# Altium PCB PCB.PcbDoc (part 1 of 2)
Units mil, origin at the board's own origin, x right, y up, seen from the top; angles counter-clockwise.
Board outline 3936.02 x 2558.06 mil, 4 copper layers (Top Layer 1, Top Layer, Bottom Layer, Bottom Layer 1), stack 58.4 mil thick; 158 components, 106 nets, 653 pads, 482 vias.
Unrouted connection lines stored in the file: 11.
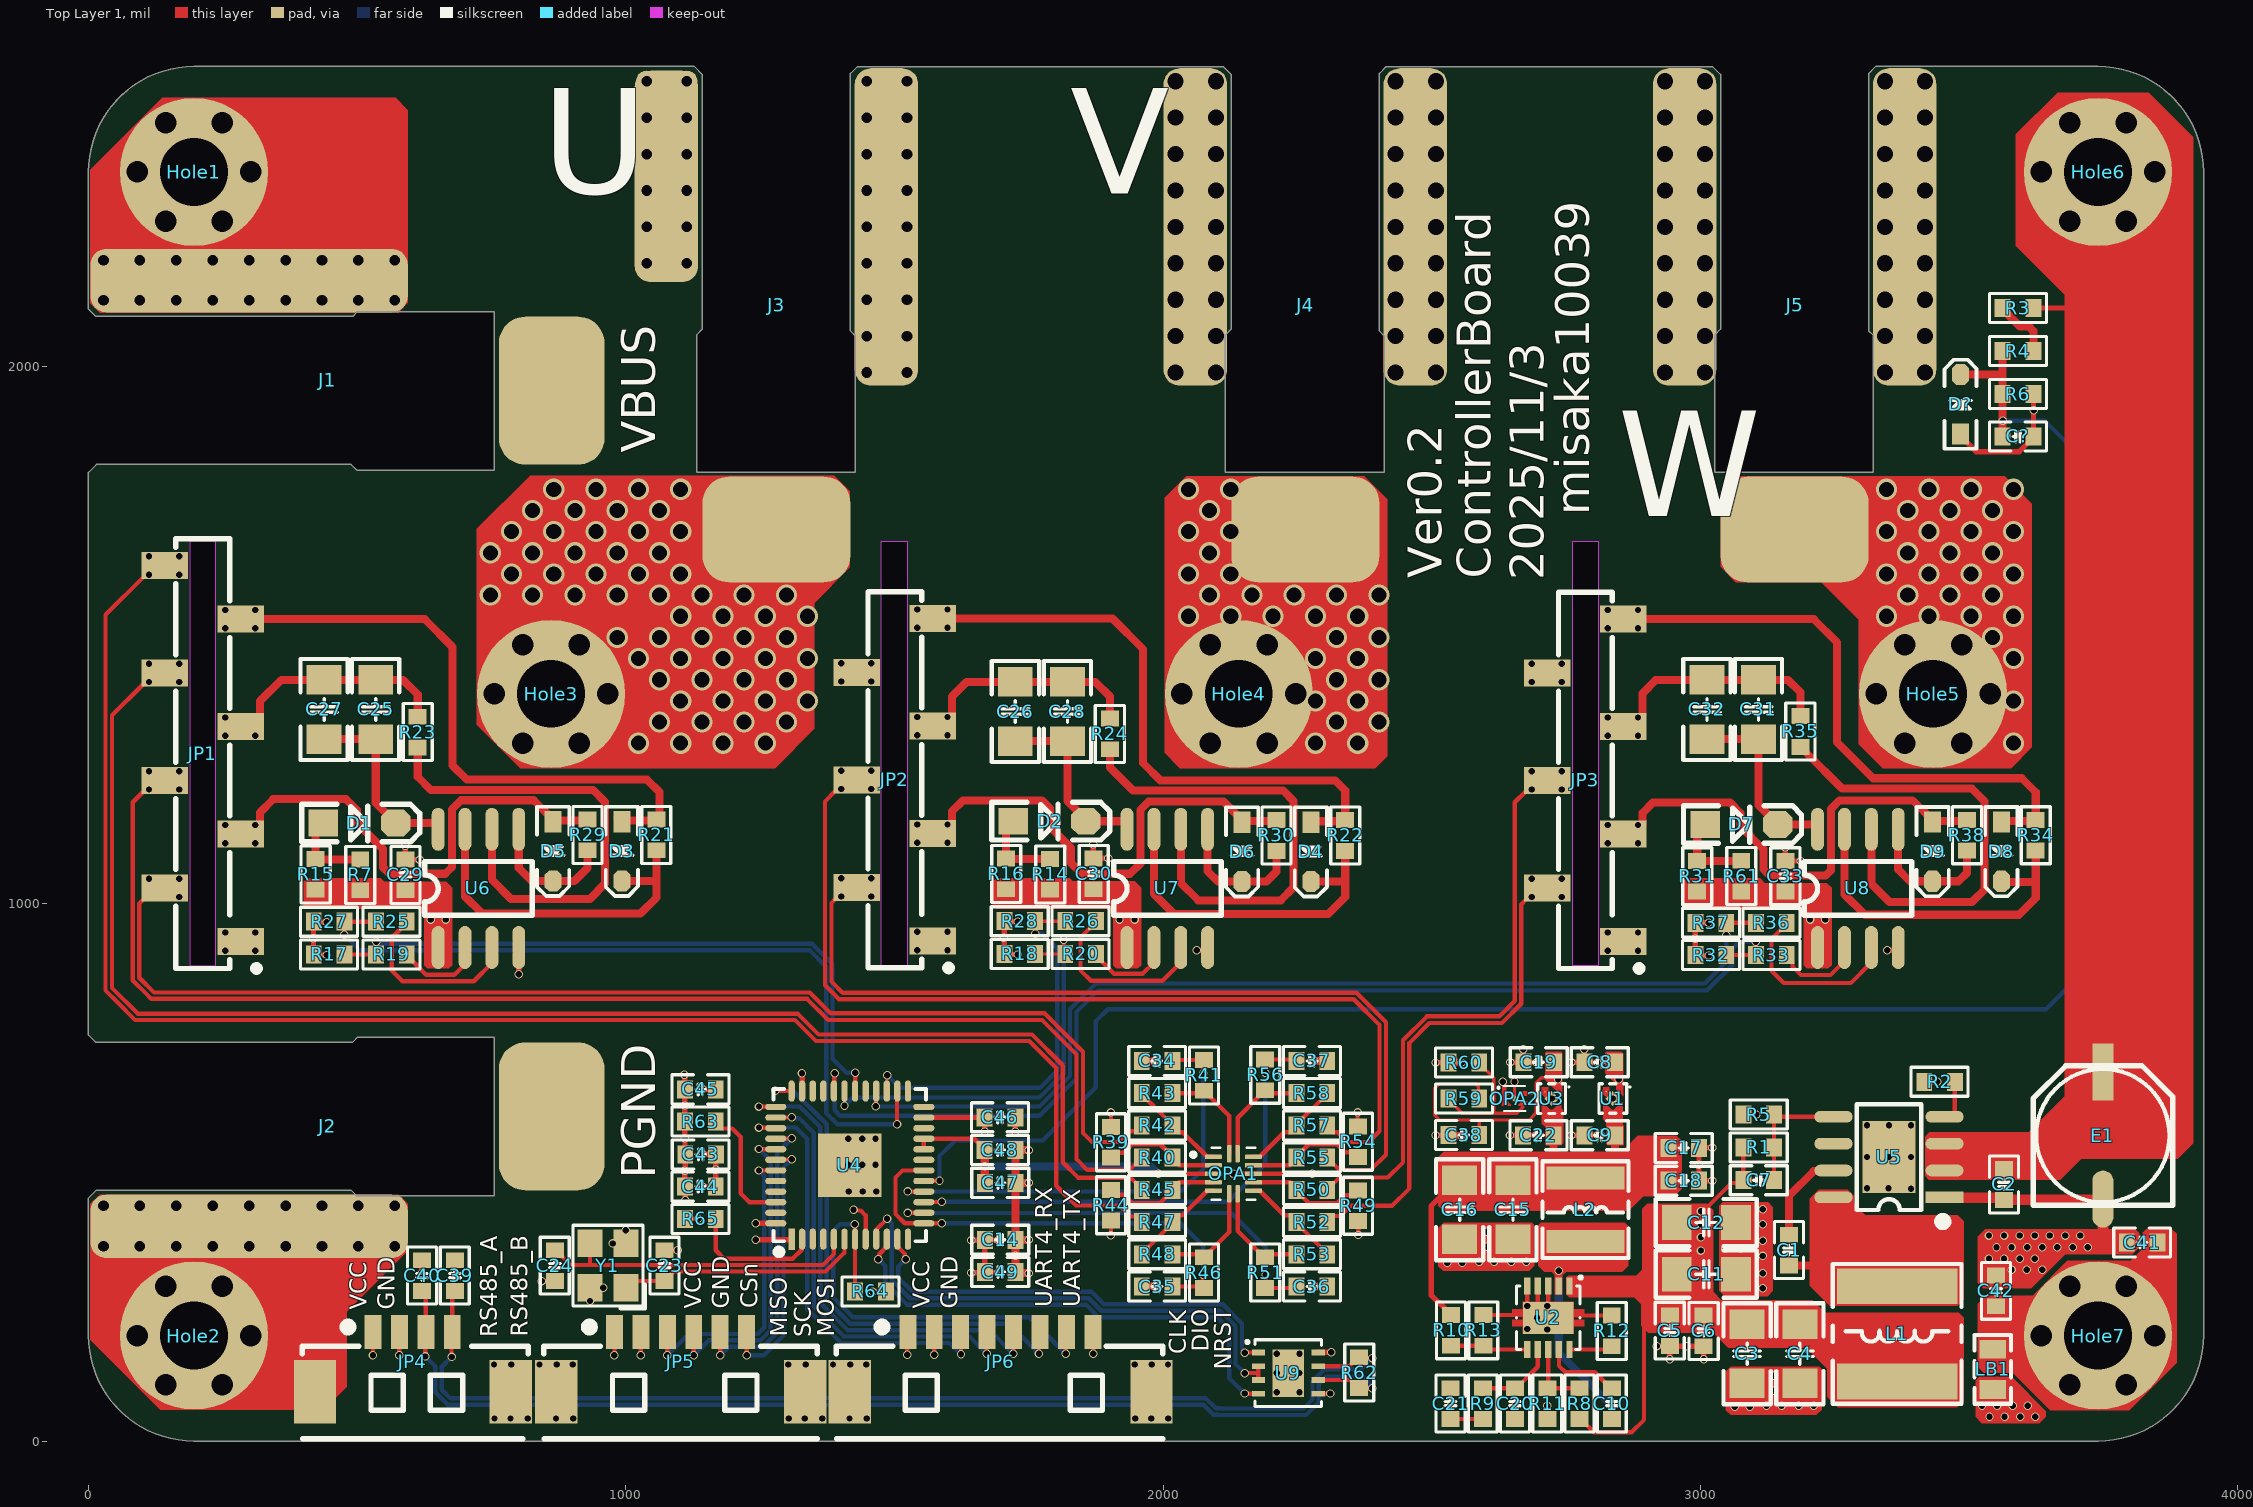
[diagram p0: Top Layer 1 view]
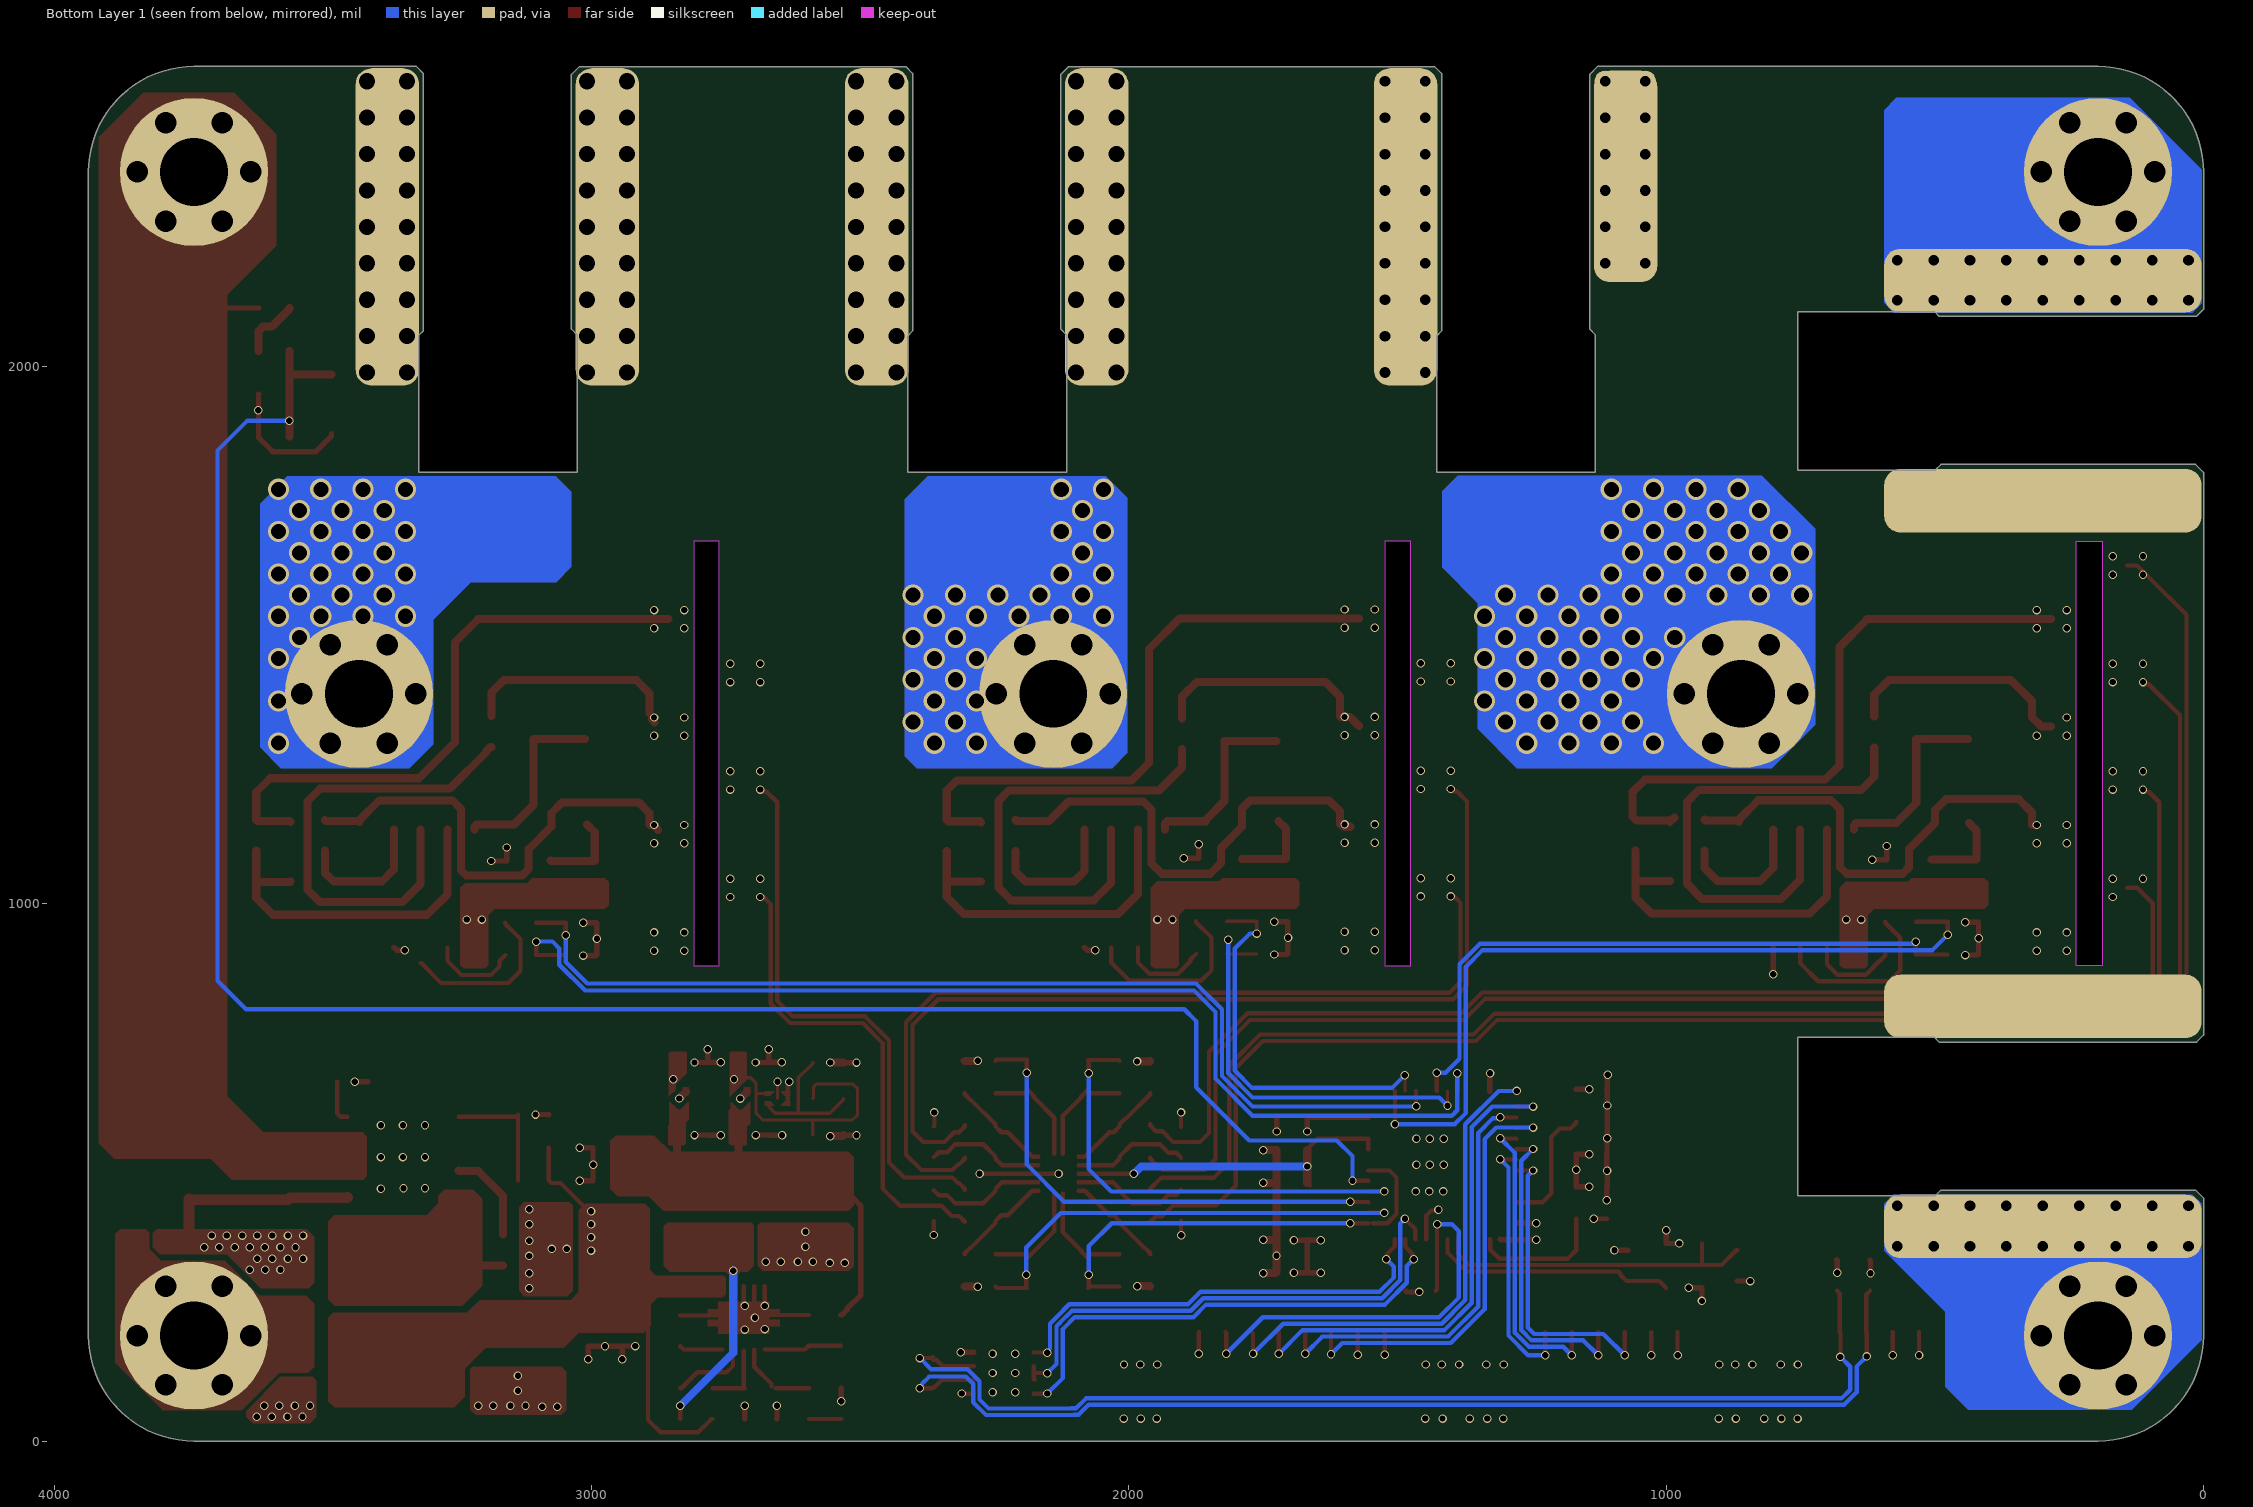
[diagram p1: Bottom Layer 1 view, seen from below]
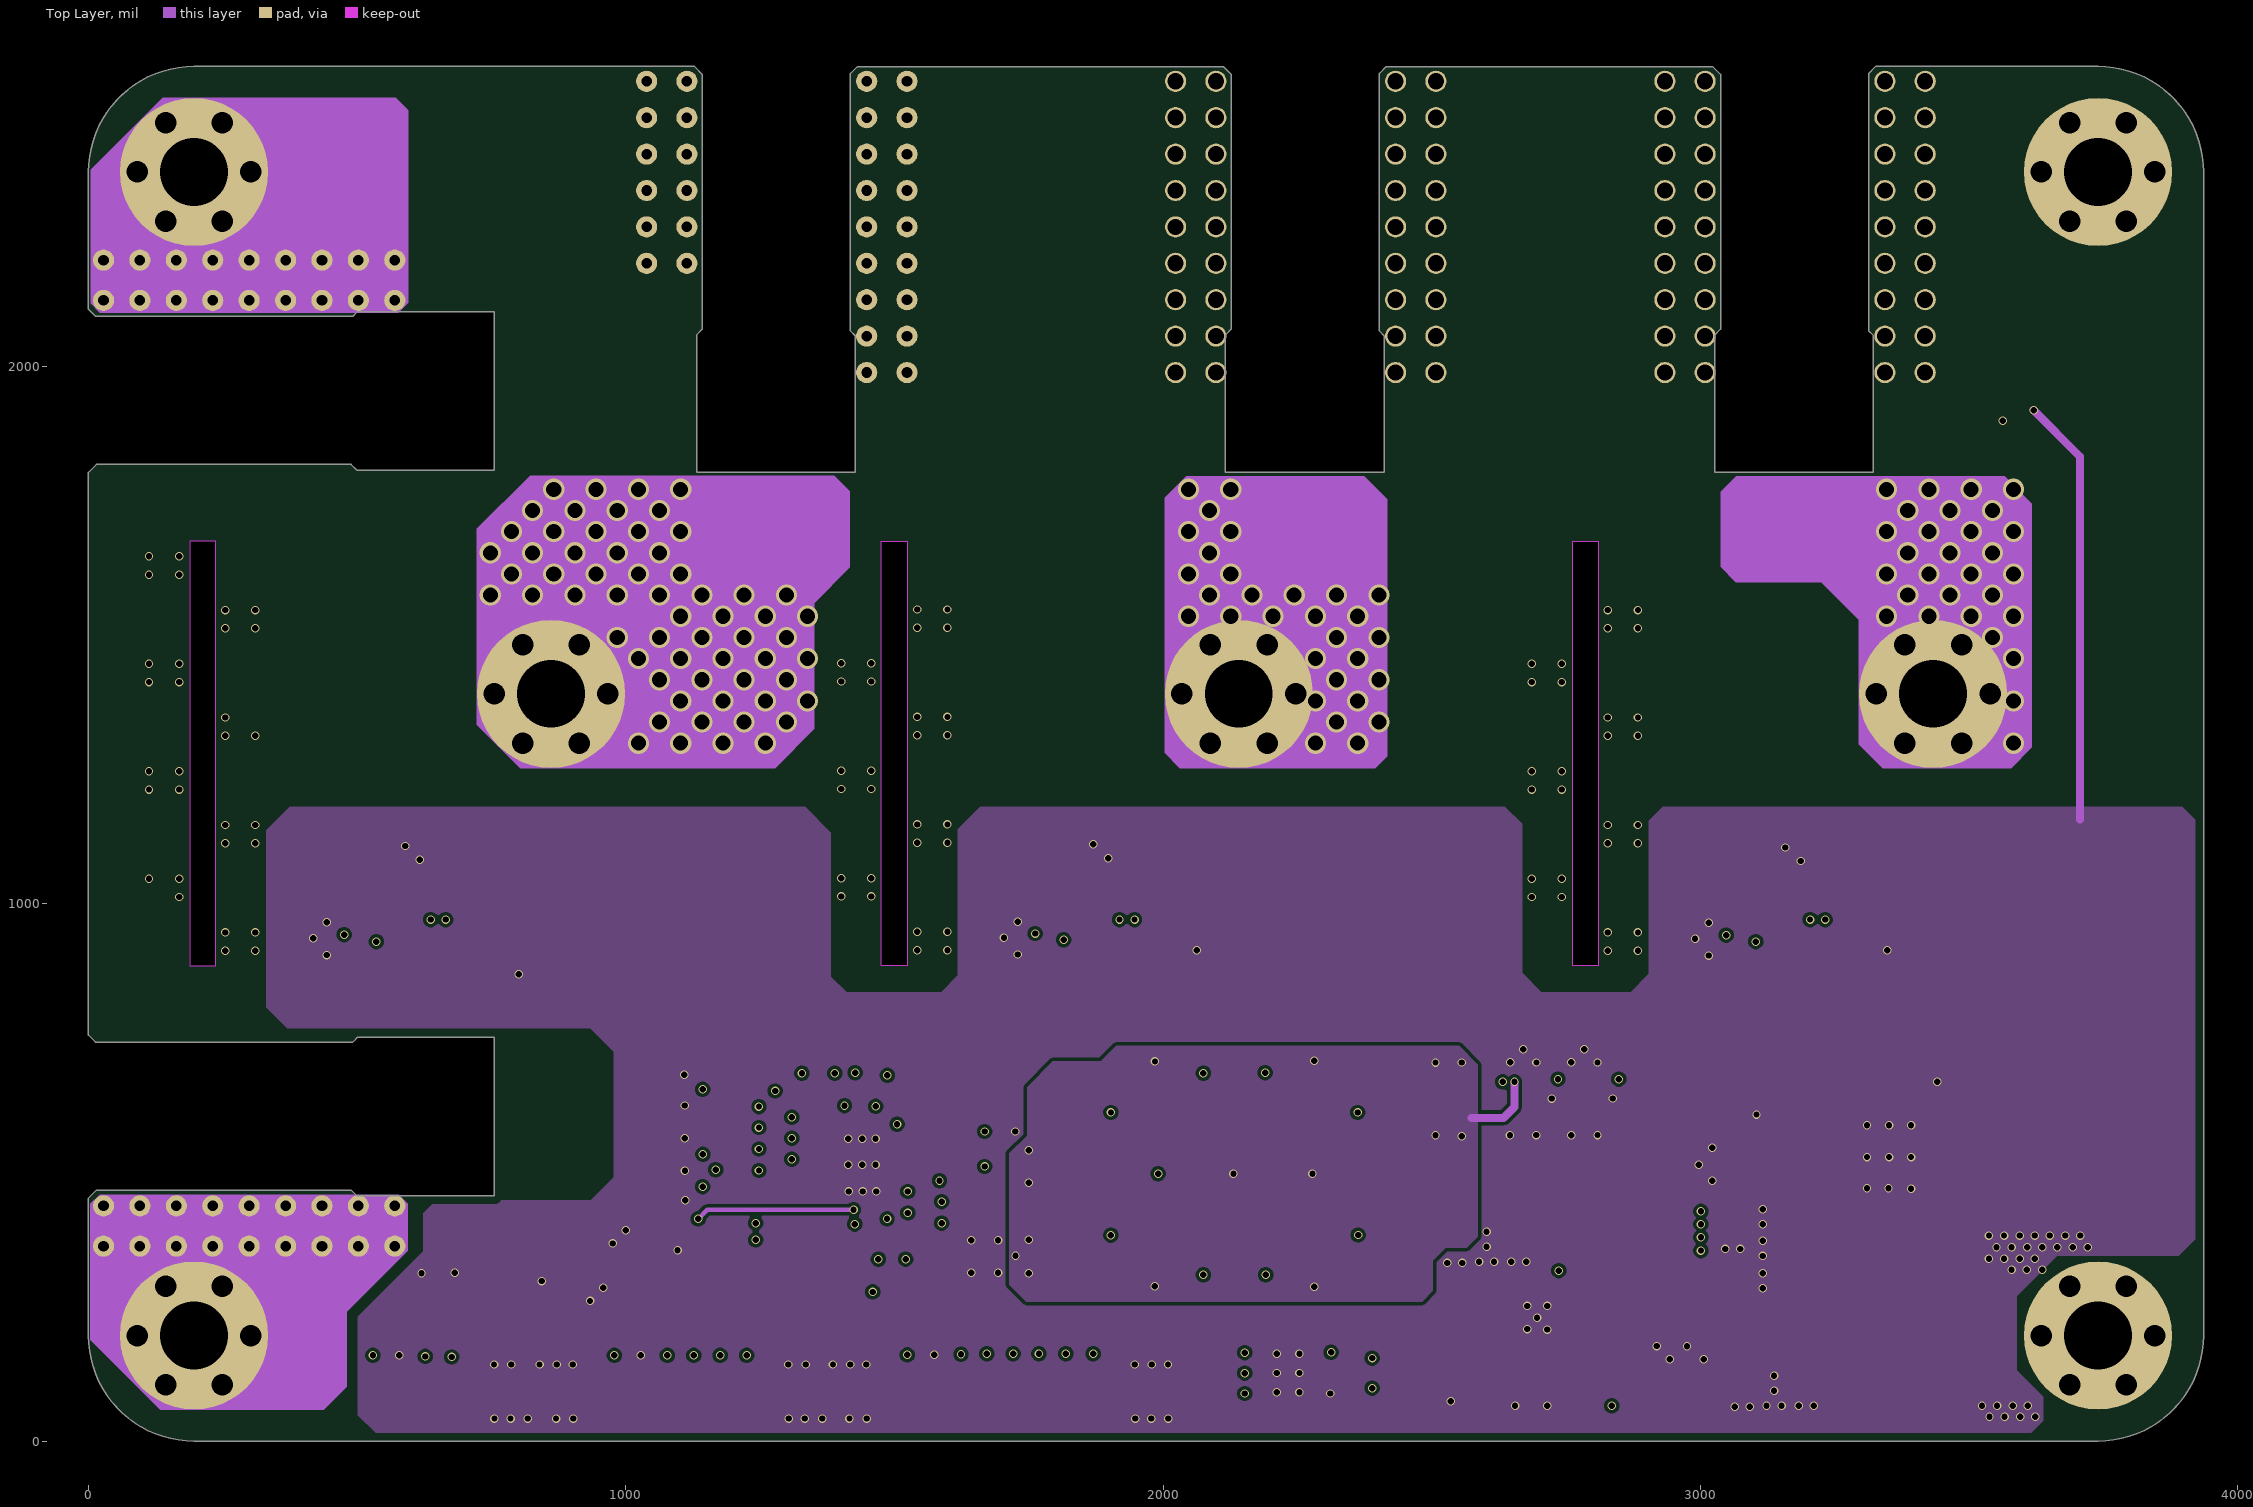
[diagram p2: Top Layer]
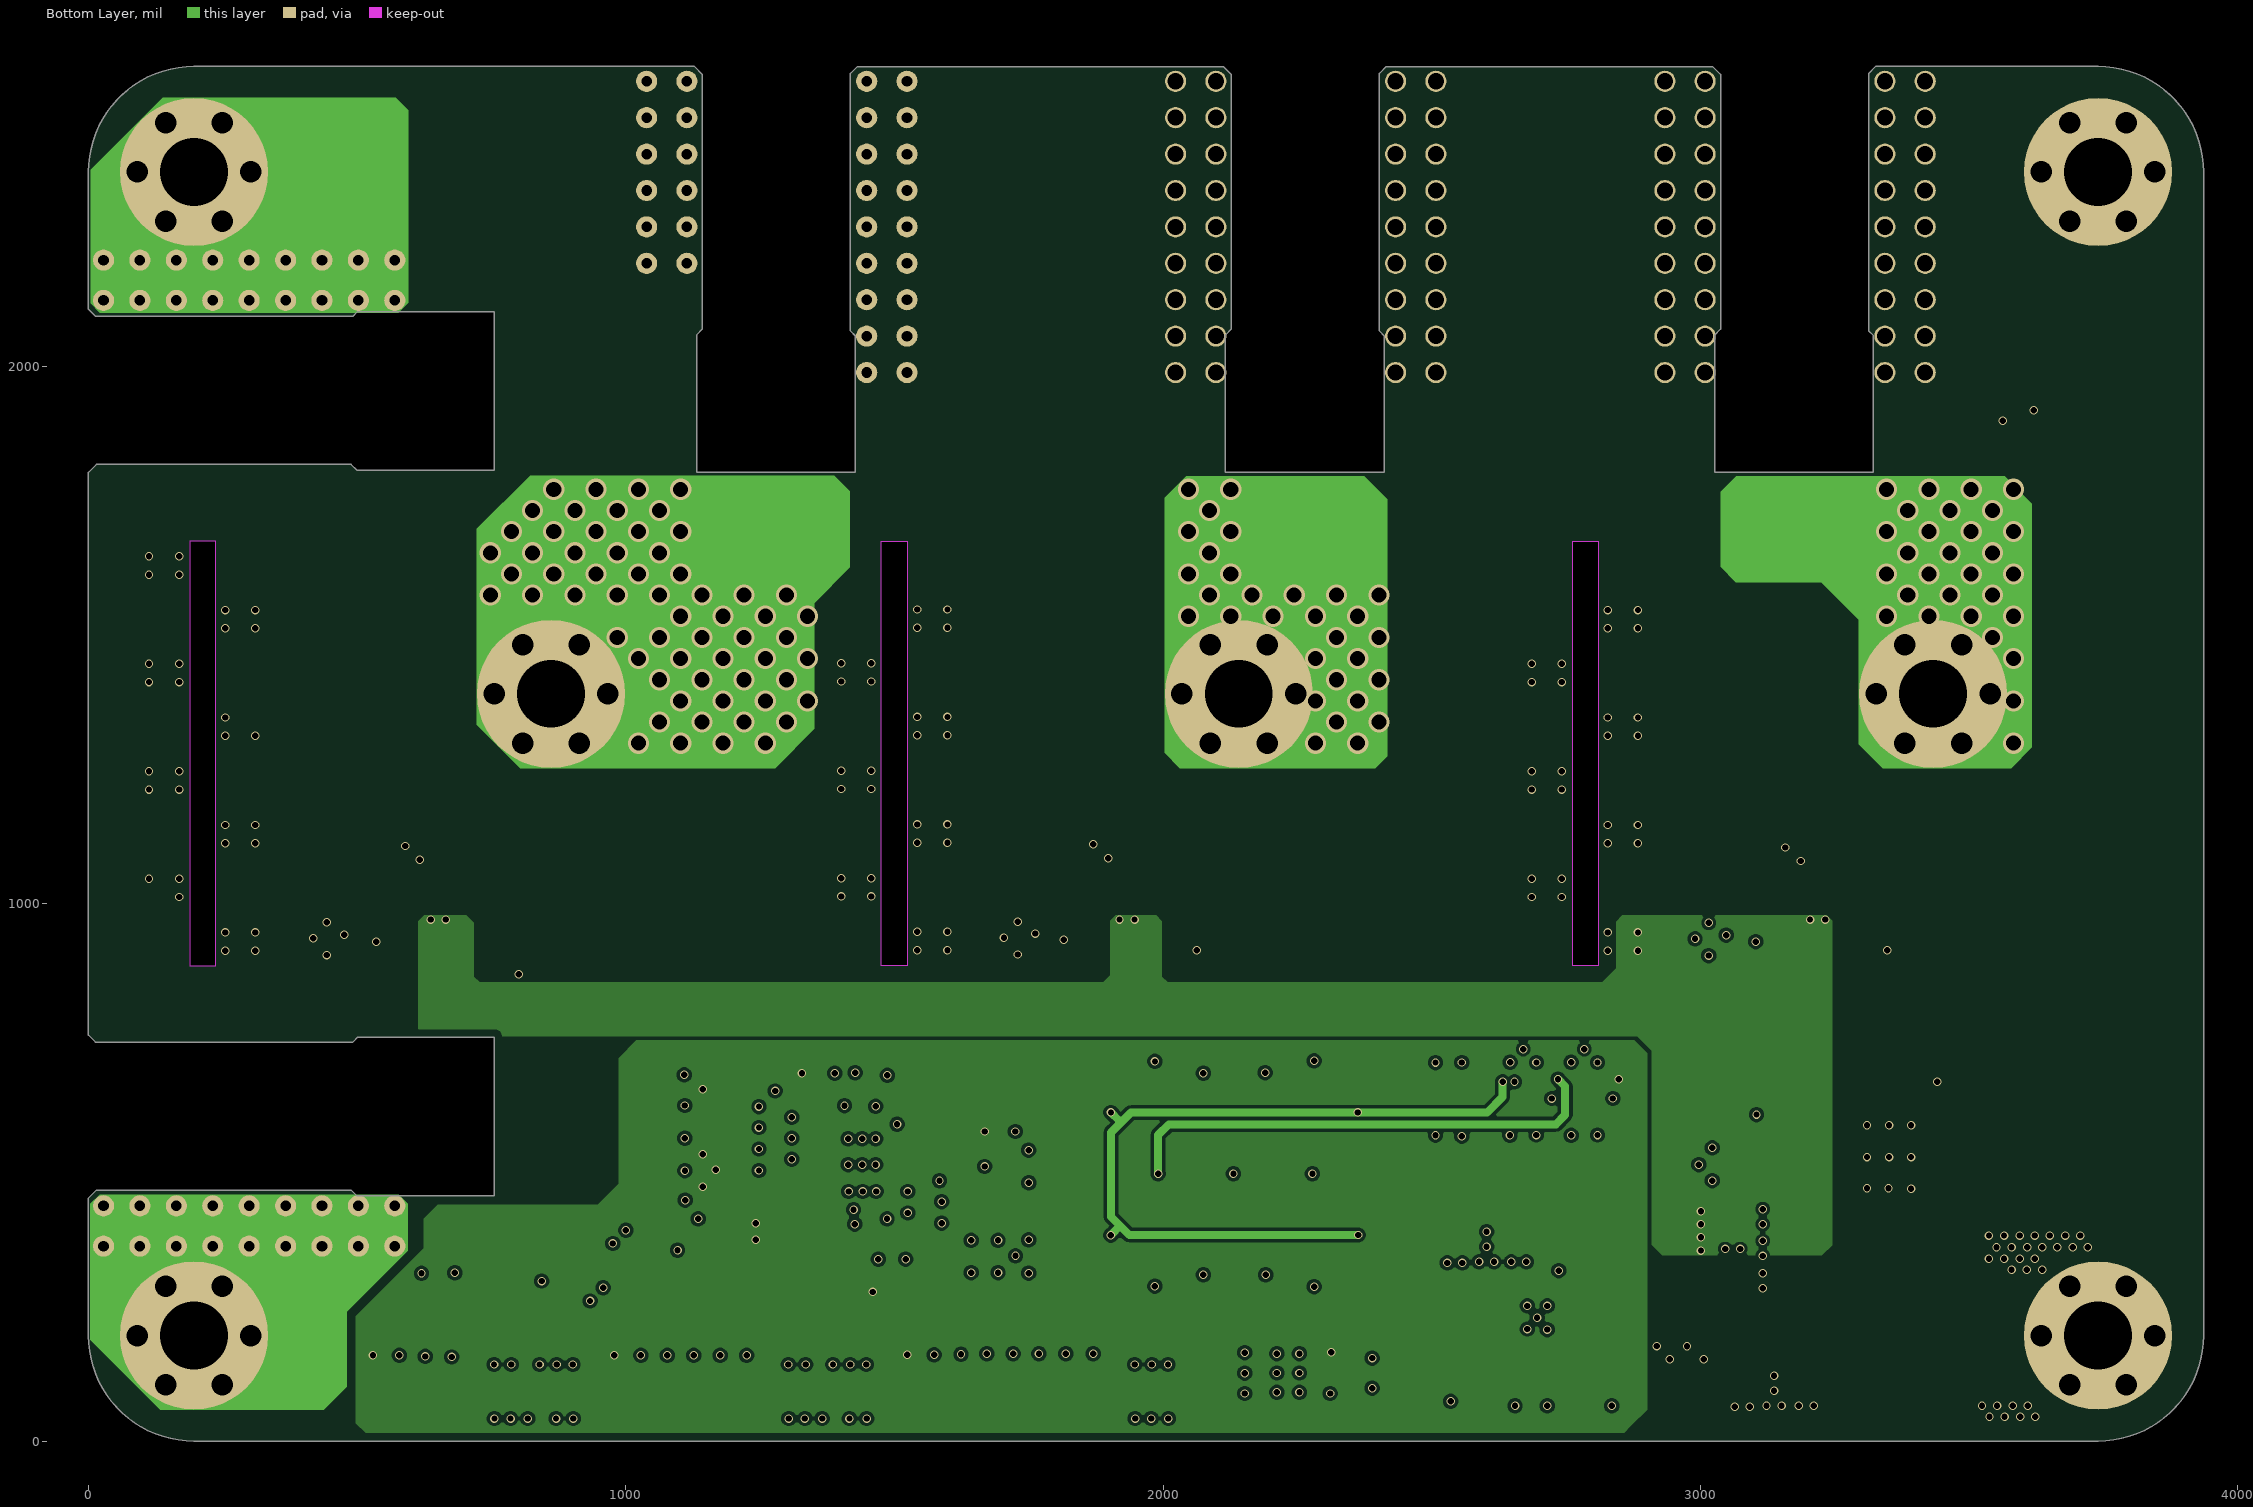
[diagram p3: Bottom Layer]
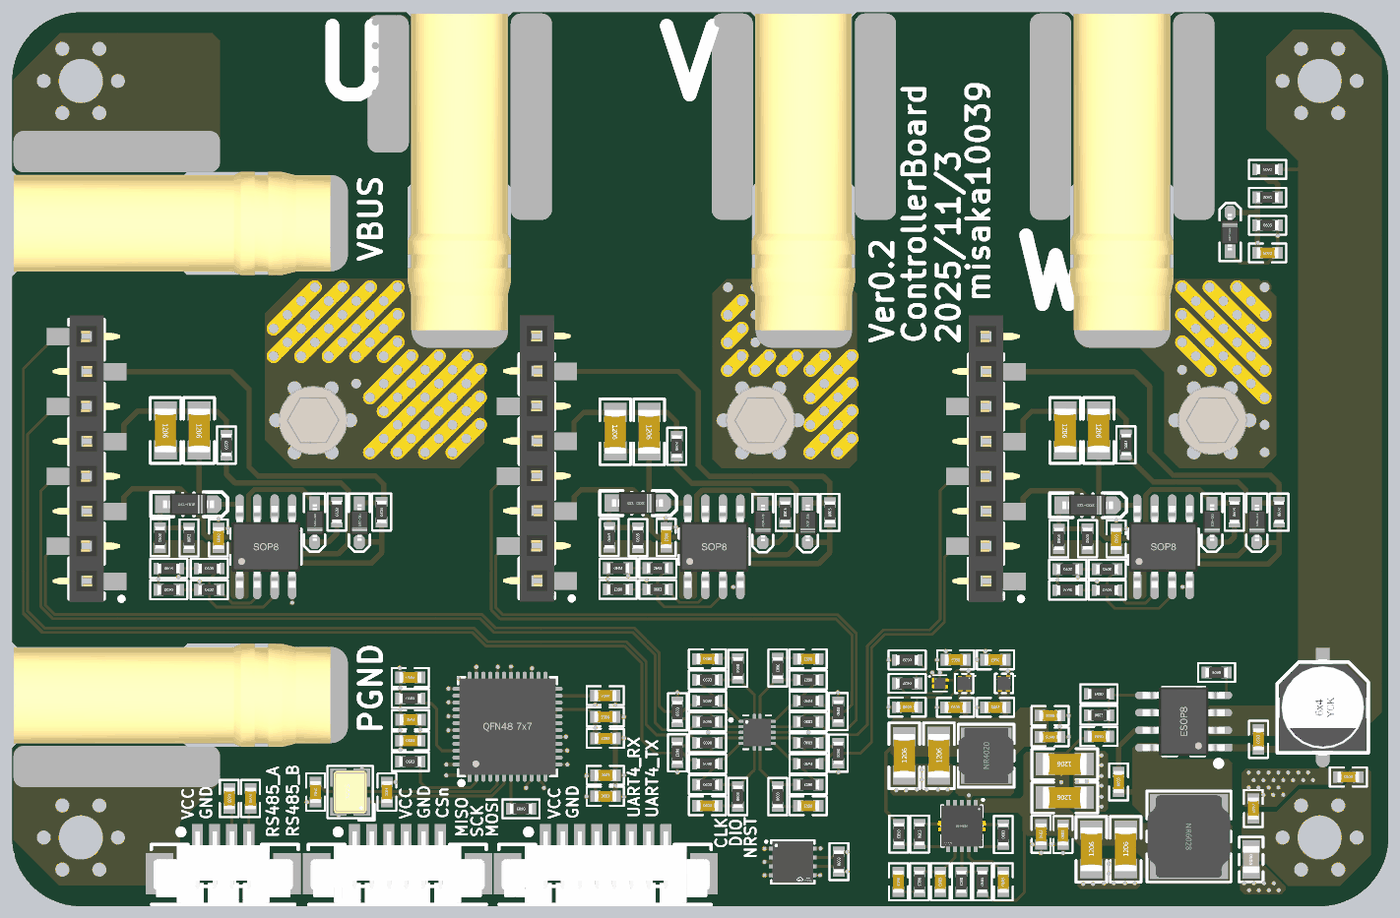
[diagram p5: 3D render of the assembled board from above, using the file's embedded part models]

## Layer stack, top to bottom
Top Solder: solder mask 0.4, Solder Resist, Dk 3.5
Top Layer 1: signal copper 1.378
Dielectric 2: prepreg 2.8, PP-006, Dk 4.1
Top Layer: signal copper 1.4
Dielectric 1: dielectric 47.2441, FR-4, Dk 4.8
Bottom Layer: signal copper 1.4
Dielectric 3: prepreg 2.8, PP-006, Dk 4.1
Bottom Layer 1: signal copper 1.378
Bottom Solder: solder mask 0.4, Solder Resist, Dk 3.5

## Board outline
196.6,0.5 cw(c196.6,196.85) 0.25,196.85 0.25,452.65 15.07,467.46 488.94,467.46 499.78,456.62 755.43,456.62 755.43,751.9 501.14,751.9 492.29,743.05 13.22,743.05 13.22,743.07 0.25,756.04 0.25,1803.2 15.07,1818.02 488.94,1818.02 499.78,1807.18 755.43,1807.18 755.43,2102.46 501.14,2102.46 492.29,2093.61 13.22,2093.61 13.22,2093.62 0.25,2106.6 0.25,2362.21 cw(c196.6,2362.21) 196.6,2558.56 1127.77,2558.56 1142.65,2543.67 1142.65,2069.8 1131.81,2058.96 1131.81,1803.31 1427.09,1803.31 1427.09,2057.6 1418.24,2066.45 1418.24,2545.52 1418.26,2545.52 1431.23,2558.49 2112.11,2558.49 2126.93,2543.67 2126.93,2069.8 2116.09,2058.96 2116.09,1803.31 2411.37,1803.31 2411.37,2057.6 2402.52,2066.45 2402.52,2545.52 2402.54,2545.52 2415.51,2558.49 3022.73,2558.49 3037.48,2543.74 3037.48,2069.87 3026.64,2059.03 3026.64,1803.38 3321.92,1803.38 3321.92,2057.67 3313.07,2066.52 3313.07,2545.59 3313.09,2545.59 3326.06,2558.56 3739.91,2558.56 cw(c3739.91,2362.21) 3936.27,2362.21 3936.27,196.85 cw(c3739.91,196.85) 3739.91,0.5
cut-out: 2762,885 2762,1675 2810,1675 2810,885
cut-out: 1476,885 1476,1675 1524,1675 1524,885
cut-out: 189,884.74 237,884.74 237.26,885 237.26,1675 237,1675.27 189,1675.27 188.74,1675

## Design rules (kind name [scope] priority, off if disabled: settings)
BoardOutlineClearance [All] p1: gap=15 ignorepadtopadclearanceinfootprint=FALSE
Clearance [All] p1: gap=6 ignorepadtopadclearanceinfootprint=TRUE except(0: Arc-Text Track-Text SMDPad-Text THPad-Text Via-Text Fill-Text Poly-Text Region-Text Text-Text; 4: Arc-Arc Arc-Track Arc-Via Track-Track Track-Via; 10: SMDPad-Via THPad-Via Via-Via)
FanoutControl Fanout_Default [All] p1: bgadir=Out bgaviamode=Centered fanoutstyle=Auto fanoutdirection=Alternating viagrid=1 // Fanout_Default (Default Rule)
FanoutControl Fanout_Small [(CompPinCount < 5)] p2: bgadir=Out bgaviamode=Centered fanoutstyle=Auto fanoutdirection=OutThenIn viagrid=1 // Fanout_Small (Default Rule)
FanoutControl Fanout_LCC [IsLCC] p4: bgadir=Out bgaviamode=Centered fanoutstyle=Auto fanoutdirection=Alternating viagrid=1 // Fanout_LCC (Default Rule)
FanoutControl Fanout_BGA [IsBGA] p5: bgadir=Out bgaviamode=Centered fanoutstyle=Auto fanoutdirection=Alternating viagrid=1 // Fanout_BGA (Default Rule)
PolygonConnect [All] p1: thpad.connectstyle=Relief thpad.reliefconductorwidth=6 thpad.reliefentries=4 thpad.polygonreliefangle="90 Angle" thpad.airgapwidth=6 smdpad.connectstyle=Relief smdpad.reliefconductorwidth=10 smdpad.reliefentries=4 smdpad.polygonreliefangle="90 Angle" smdpad.airgapwidth=10 via.connectstyle=Direct via.reliefconductorwidth=10 via.reliefentries=4 via.polygonreliefangle="90 Angle" via.airgapwidth=10
RoutingVias [All] p1: holewidth=11.81 width=15.75 viastyle="Through Hole" minholewidth=11.81 minwidth=15.75 maxholewidth=39.37 maxwidth=39.37
SolderMaskExpansion [isvia] p1: expansion=1 istentingtop=TRUE soldermaskfromhole=TRUE
Width [All] p1: maxlimit=100 minlimit=4 preferedwidth=10
26 further rules are at their usual default settings.

## Classes and differential pairs
component class power: C1 C2 C3 C4 C5 C6 C7 C8 C9 C10 C11 C12 C15 C16 C17 C18 C19 C20 C21 C22 C? D? E1 L1 L2 R1 R2 R3 R4 R5 R6 R8 R9 R10 R11 R12 R13 U1 U2 U3 U5
component class mcu: C14 C23 C24 C34 C35 C36 C37 C38 C39 C40 C43 C44 C45 C46 C47 C48 C49 OPA1 OPA2 R39 R40 R41 R42 R43 R44 R45 R46 R47 R48 R49 R50 R51 R52 R53 R54 R55 R56 R57 R58 R59 R60 R62 R63 R64 R65 U4 U9 Y1
component class driver: C25 C26 C27 C28 C29 C30 C31 C32 C33 D1 D2 D3 D4 D5 D6 D7 D8 D9 R7 R14 R15 R16 R17 R18 R19 R20 R21 R22 R23 R24 R25 R26 R27 R28 R29 R30 R31 R32 R33 R34 R35 R36 R37 R38 R61 U6 U7 U8
component class Connector: C41 C42 Hole1 Hole2 Hole3 Hole4 Hole5 Hole6 Hole7 J1 J2 J3 J4 J5 JP1 JP2 JP3 JP4 JP5 JP6 LB1

## Components (designator, comment, footprint, x,y, rotation, side; value= is the part's Value field where it differs from the comment)
C1 "100nF 100V" C0603_l 3165,356 r90 top
C2 "1nF 100V" C0603_l 3565,478 r90 top
C3 "22uF 35V" C1206_L 3087,163 r90 top
C4 "22uF 35V" C1206_L 3185,163 r90 top
C5 "4.7uF 35V" C0603_l 2943,206 r90 top
C6 "100nF 35V" C0603_l 3006,205.46 r90 top
C7 "3.3nF 100V" C0603_l 3108.46,486 r180 top
C8 "4.7uF 16V" C0603_l 2812.54,705.47 r180 top
C9 "4.7uF 16V" C0603_l 2812.54,569.47 r0 top
C10 "100nF/25V" c0603_l 2835.13,70.21 r90 top
C11 "10uF/25V" C1206_l 3011,311 r180 top
C12 "10uF/25V" C1206_l 3011,407 r180 top
C14 "100nF 16V DNP" C0603_L 1697,375 r0 top
C15 "22uF/16V" C1206_l 2651,431 r90 top
C16 "22uF/16V" C1206_l 2552,430.88 r90 top
C17 "4.7uF/16V" c0603_l 2969,546 r180 top
C18 "100nF/16V" c0603_l 2969,485 r180 top
C19 "4.7uF 16V" C0603_l 2699,705.47 r180 top
C20 "68pF/25V" c0603_l 2655.13,70.21 r90 top
C21 "560pF/25V" c0603_l 2535.13,70.21 r270 top
C22 "4.7uF 16V" C0603_l 2698.54,569.47 r0 top
C23 "Capacitor" c0603_l 1072,327 r90 top
C24 "Capacitor" c0603_l 868,327 r270 top
C25 "10uF 35V" C1206_l 534.84,1362 r270 top
C26 "10uF 35V" C1206_l 1725,1358.12 r270 top
C27 "10uF 35V" C1206_l 438.84,1362 r270 top
C28 "10uF 35V" C1206_l 1822,1358.12 r270 top
C29 "100nF 35V" C0603_l 590,1054 r270 top
C30 "100nF 35V" C0603_l 1871,1056 r270 top
C31 "10uF 35V" C1206_l 3108,1362 r270 top
C32 "10uF 35V" C1206_l 3012,1362 r270 top
C33 "100nF 35V" C0603_l 3158.09,1051.54 r270 top
C34 "1nF 6.3V" C0603_L 1989,708 r0 top
C35 "1nF 6.3V" C0603_L 1989,288 r0 top
C36 "1nF 6.3V" C0603_L 2277,288 r180 top
C37 "1nF 6.3V" C0603_L 2277,708 r180 top
C38 "1nF 6.3V" C0603_L 2560,570 r0 top
C39 "1nF 6.3V" C0603_L 682,308.54 r90 top
C40 "1nF 6.3V" C0603_L 621,308.54 r270 top
C41 "100nF 16V DNP" C0603_L 3822,370 r0 top
C42 "100nF 16V DNP" C0603_L 3550,280 r270 top
C43 "100nF 6.3V" C0603_L 1139.46,534 r0 top
C44 "100nF 6.3V" C0603_L 1139,474 r0 top
C45 "100nF 6.3V" C0603_L 1139,655 r0 top
C46 "100nF 6.3V" C0603_L 1696.54,603 r180 top
C47 "4.7uF 6.3V" C0603_L 1697,481 r180 top
C48 "100nF 6.3V" C0603_L 1696.54,542 r180 top
C49 "100nF 16V DNP" C0603_L 1697,315 r0 top
C? "100nF/16V" c0603_l 3591,1870 r180 top
D1 "FR107" SOD-123 504.5,1150.54 r0 top
D2 "FR107" SOD-123 1789,1154 r0 top
D3 "1N4148" SOD-323 993,1097.88 r270 top
D4 "1N4148" SOD-323 2275,1096.88 r270 top
D5 "1N4148" SOD-323 865,1097.88 r270 top
D6 "1N4148" SOD-323 2147,1097 r270 top
D7 "FR107" SOD-123 3076.09,1148 r0 top
D8 "1N4148" SOD-323 3560,1097.32 r270 top
D9 "1N4148" SOD-323 3432,1097.44 r270 top
D? "BZT52C3V3S" SOD-323 3484,1930 r90 top
E1 "10uF 100V" "CT 6*4 - V" 3749,569 r90 top
Hole1 "M3螺纹孔" M3_3*7载流孔_铜柱 196.6,2362.21 r0 top locked
Hole2 "M3螺纹孔" M3_3*7载流孔_铜柱 196.6,196.85 r0 top locked
Hole3 "M3螺纹孔" M3_3*7载流孔_螺丝 861,1391 r0 top locked
Hole4 "M3螺纹孔" M3_3*7载流孔_螺丝 2141,1391 r0 top locked
Hole5 "M3螺纹孔" M3_3*7载流孔_螺丝 3433,1391 r0 top locked
Hole6 "M3螺纹孔" M3_3*7载流孔_铜柱 3739.91,2362.21 r0 top locked
Hole7 "M3螺纹孔" M3_3*7载流孔_铜柱 3739.91,196.85 r0 top locked
J1 "XT150母座夹板" "XT150_母座夹板 - VBUS" 862.27,1955.28 r0 top locked
J2 "XT150母座夹板" "XT150_母座夹板 - PGND" 862.27,604.72 r0 top locked
J3 "XT150母座夹板" "XT150_母座夹板 - duplicate" 1280.45,1697.01 r270 top locked
J4 "XT150母座夹板" XT150_母座夹板 2264.72,1697.01 r270 top locked
J5 "XT150母座夹板" XT150_母座夹板 3175.28,1697.01 r270 top locked
JP1 "HDR-1X8" "贴片排母2.54mm_交错_8P - 正脚位" 142,1030 r90 top
JP2 "HDR-1X8" "贴片排母2.54mm_交错_7P - 正脚位" 1430,1031 r90 top
JP3 "HDR-1X8" "贴片排母2.54mm_交错_7P - 正脚位" 2715,1030 r90 top
JP4 "HDR-1X4" "MX 1.25-WS-4P" 604,92.72 r0 top
JP5 "HDR-1X6" "MX 1.25-WS-6P" 1102.57,92.72 r0 top
JP6 "HDR-1X8" "MX 1.25-WS-8P" 1697.79,92.72 r0 top
L1 "33uH" NR6028 3366,200 r270 top
L2 "8.2uH" NR4020 2786,431 r90 top
LB1 "500R@100MHz" "FB 0805_L" 3544,134 r270 top
OPA1 "TLV9064 RUC" "TLV9064 RUC" 2131,498 r0 top
OPA2 "TLV9061 DPW" X2SON-4_L0.8-W0.8-P0.48-TL-DPW 2654,638 r0 top
R1 "90K 1%" r0603_l 3108.46,547 r0 top
R2 "60K 1%" r0603_l 3445,669 r180 top
R3 "150K 1%" r0603_l 3591,2109 r180 top
R4 "150K 1%" r0603_l 3591,2029 r180 top
R5 "10K 1%" r0603_l 3108.46,608 r180 top
R6 "10K 1%" r0603_l 3591,1949 r0 top
R7 "10R 1%" R0603_l 506,1054 r90 top
R8 "1K 1%" r0603_l 2775.13,70.21 r90 top
R9 "18.7K 1%" r0603_l 2595.13,70.21 r270 top
R10 "100K 1%" r0603_l 2536,206.54 r270 top
R11 "1K 1%" r0603_l 2715.13,70.21 r270 top
R12 "1K 1%" r0603_l 2835,205.54 r90 top
R13 "19.1K 1%" r0603_l 2596,206.54 r90 top
R14 "10R 1%" R0603_l 1790,1055 r90 top
R15 "10R 1%" r0603_l 423,1055 r90 top
R16 "10R 1%" r0603_l 1708,1056 r90 top
R17 "10K 1%" r0603_l 448,906 r180 top
R18 "10K 1%" r0603_l 1733.46,907 r180 top
R19 "100R 1%" r0603_l 564,906 r0 top
R20 "100R 1%" r0603_l 1846.54,907 r0 top
R21 "51R 1%" r0603_l 1057,1128.46 r90 top
R22 "51R 1%" r0603_l 2339,1127.46 r90 top
R23 "5.1R 1%" r0603_l 613,1320 r90 top
R24 "5.1R 1%" r0603_l 1901,1316.54 r90 top
R25 "100R 1%" r0603_l 564,967 r0 top
R26 "100R 1%" r0603_l 1846.54,968 r0 top
R27 "10K 1%" r0603_l 448,967 r0 top
R28 "10K 1%" r0603_l 1733.46,968 r0 top
R29 "51R 1%" r0603_l 929,1128.46 r90 top
R30 "51R 1%" r0603_l 2211,1127.46 r90 top
R31 "10R 1%" r0603_l 2994.09,1051.54 r90 top
R32 "10K 1%" r0603_l 3019.54,905 r180 top
R33 "100R 1%" r0603_l 3132.09,905 r0 top
R34 "51R 1%" r0603_l 3624,1127.9 r90 top
R35 "5.1R 1%" r0603_l 3186,1321 r90 top
R36 "100R 1%" r0603_l 3132.09,965 r0 top
R37 "10K 1%" r0603_l 3019.54,965 r0 top
R38 "51R 1%" r0603_l 3496,1127.9 r90 top
R39 "56K 1%" R0603_l 1903,556.54 r90 top
R40 "1K 1%" R0603_l 1989,528 r180 top
R41 "22R 1%" R0603_l 2076,681 r270 top
R42 "1K 1%" R0603_l 1989,588 r180 top
R43 "56K 1%" R0603_l 1989,648 r0 top
R44 "100K 1%" R0603_l 1903,439.46 r270 top
R45 "1K 1%" R0603_l 1989,468 r180 top
R46 "22R 1%" R0603_l 2076,314 r90 top
R47 "1K 1%" R0603_l 1989,408 r180 top
R48 "100K 1%" R0603_l 1989,348 r0 top
R49 "56K 1%" R0603_l 2363,438.46 r270 top
R50 "1K 1%" R0603_l 2277,468 r0 top
R51 "22R 1%" R0603_l 2190,314 r90 top
R52 "1K 1%" R0603_l 2277,408 r0 top
R53 "56K 1%" R0603_l 2277,348 r180 top
R54 "56K 1%" R0603_l 2363,557.54 r90 top
R55 "1K 1%" R0603_l 2277,528 r0 top
R56 "22R 1%" R0603_l 2190,682 r270 top
R57 "1K 1%" R0603_l 2277,588 r0 top
R58 "56K 1%" R0603_l 2277,648 r180 top
R59 "20K 1%" R0603_l 2560,638 r180 top
R60 "20K 1%" R0603_l 2560,705 r180 top
R61 "10R 1%" R0603_l 3076,1052 r90 top
R62 "120R 1%" R0603_l 2365,128 r90 top
R63 "10K 1%" R0603_l 1139,595 r0 top
R64 "10K 1%" R0603_l 1455.54,279 r180 top
R65 "0R 1%" R0603_l 1139,414 r0 top
U1 "TP132C33D4_X2SON" ZQFN-4L_L1.0-W1.0-P0.63-BL-EP 2837,638 r180 top
U2 "TPS54335A-QFN" VSON-10_L3.0-W3.0-P0.50-TL-EP 2717,229.88 r270 top
U3 "LP5907_X2SON" ZQFN-4L_L1.0-W1.0-P0.63-BL-EP 2723.2,637.93 r180 top
U4 "STM32G431CBUx" "QFN48 7X7_M" 1417,514 r0 top
U5 "KP521001" ESOP8_N 3351,529 r180 top
U6 "EG3113" SOP-8 726,1029 r90 top
U7 "EG3113" SOP-8 2008,1029 r90 top
U8 "EG3113" SOP-8 3293.09,1029 r90 top
U9 "SIT3088E" DFN-8_L3.0-W3.0-P0.65-BL-EP 2233,127 r270 top
Y1 "8Mhz" "OSC 3225-4P" 967,327 r90 top

## Footprints (in the part's own frame and the unit in brackets; to place one, negate y for a bottom-side part, rotate by r counter-clockwise, add the part's x,y. Pads: shape width x height; smd on the part's side, far side on the other; paste and mask are expansions set on the pad)
C0603_l [mm] "贴片MLCC电容"
  rect 0.75x0.85 smd: 1(-0.725,0) 2(0.725,0)
  silkscreen extent -1.35,-0.69 1.35,0.69, body extent -0.8,-0.4 0.8,0.4, height 0.8
c0603_l [mm] "贴片MLCC电容"
  rect 0.75x0.85 smd: 1(-0.725,0) 2(0.725,0)
  silkscreen extent -1.35,-0.69 1.35,0.69, body extent -0.8,-0.4 0.8,0.4, height 0.8
C0603_L [mm] "贴片MLCC电容"
  rect 0.75x0.85 smd: 1(-0.725,0) 2(0.725,0)
  silkscreen extent -1.35,-0.69 1.35,0.69, body extent -0.8,-0.4 0.8,0.4, height 0.8
C1206_L [mm] "贴片MLCC电容"
  rect 1.4x1.65 smd: 1(-1.4,0) 2(1.4,0)
  silkscreen extent -2.39,-1.12 2.39,1.12, body extent -1.6,-0.8 1.6,0.8, height 1.1
C1206_l [mm] "贴片MLCC电容"
  rect 1.4x1.65 smd: 1(-1.4,0) 2(1.4,0)
  silkscreen extent -2.39,-1.12 2.39,1.12, body extent -1.6,-0.8 1.6,0.8, height 1.1
"CT 6*4 - V" [mm] "直径6mm，高4mm"
  rect 2.7x1 smd: 1(3,0)
  oval 2.7x1 smd: 2(-3,0)
  silkscreen extent -3.3,-3.3 3.3,3.3, body extent -3.5,-3.15 3.5,3.15, height 4
DFN-8_L3.0-W3.0-P0.65-BL-EP [mm]
  rect 0.28x0.625 smd: 1(-0.975,-1.412) 2(-0.325,-1.412) 3(0.325,-1.412) 4(0.975,-1.412) 5(0.975,1.412) 6(0.325,1.412) 7(-0.325,1.412) 8(-0.975,1.412)
  rect 2.25x1.5 smd: 9(0,0)
  silkscreen extent -1.58,-2.01 1.58,1.58, body extent -1.5,-1.51 1.5,1.51, height 0.92
ESOP8_N [mm] "5*6*1.8mm（长宽高）"
  rect 1.8x0.55 smd: 1(-2.625,1.905)
  oval 1.8x0.55 smd: 2(-2.625,0.635) 3(-2.625,-0.635) 4(-2.625,-1.905) 5(2.625,-1.905) 6(2.625,-0.635) 7(2.625,0.635) 8(2.625,1.905)
  rect 2.5x3.4 smd paste-2: 9(0,0)
  rect 0.9x0.7 on Top Paste: 10(-0.625,1.1) 10(-0.625,0) 10(-0.625,-1.1) 11(0.65,1.1) 11(0.65,0) 11(0.65,-1.1)
  silkscreen extent -2.69,-2.5 1.52,3.2, body extent -3,-2.5 3,2.5, height 1.53
"FB 0805_L" [mil] "小功率贴片磁珠"
  rect 35x50 smd: 1(-37.4,0) 2(37.4,0)
  silkscreen extent -64,-34 64,34, body extent -39,-24 39,24, height 35
M3_3*7载流孔_螺丝 [mil] "双面焊盘增加接触面积"
  round 40 hole 40: 1(-106,0) 1(-53,-91.8) 1(-53,91.8) 1(53,-91.8) 1(53,91.8) 1(106,0)
  round 275.59 hole 125.98: 1(0,0)
  body extent -137,-138 137,138, height 150
M3_3*7载流孔_铜柱 [mil] "双面焊盘增加接触面积"
  round 40 hole 40: 1(-106,0) 1(-53,-91.8) 1(-53,91.8) 1(53,-91.8) 1(53,91.8) 1(106,0)
  round 275.59 hole 125.98: 1(0,0)
  body extent -137,-138 137,138, height 228
"MX 1.25-WS-4P" [mm] "长：10.15mm，宽：4.2mm，高：3.4mm"
  rect 2x3 smd: 0(-4.632,0) 0(4.632,0)
  rect 0.8x1.6 smd: 1(-1.889,2.811) 2(-0.639,2.811) 3(0.611,2.811) 4(1.861,2.811)
  silkscreen extent -5.23,-2.23 5.45,3.25, body extent -5.07,-2.1 5.07,3.09, height 3.4
"MX 1.25-WS-6P" [mm] "长：12.65mm，宽：4.2mm，高：3.4mm"
  rect 2x3 smd: 0(-5.882,0) 0(5.882,0)
  rect 0.8x1.6 smd: 1(-3.139,2.811) 2(-1.889,2.811) 3(-0.639,2.811) 4(0.611,2.811) 5(1.861,2.811) 6(3.111,2.811)
  silkscreen extent -6.48,-2.23 6.45,3.25, body extent -6.32,-2.1 6.32,3.09, height 3.4
"MX 1.25-WS-8P" [mm] "长：15.15mm，宽：4.2mm，高：3.4mm"
  rect 2x3 smd: 0(-7.132,0) 0(7.132,0)
  rect 0.8x1.6 smd: 1(-4.389,2.811) 2(-3.139,2.811) 3(-1.889,2.811) 4(-0.639,2.811) 5(0.611,2.811) 6(1.861,2.811) 7(3.111,2.811) 8(4.361,2.811)
  silkscreen extent -7.77,-2.23 7.67,3.25, body extent -7.57,-2.1 7.57,3.09, height 3.4
NR4020 [mm] "4.0mm*4.0mm*2.0mm(长*宽*高）"
  rect 1.1x3.7 smd: 1(-1.5,0) 2(1.5,0)
  silkscreen extent -2.29,-2.03 2.29,2.03, body extent -2,-2 2,2, height 2.1
NR6028 [mm] "6.0mm*6.0mm*2.8mm(长*宽*高）"
  rect 1.7x5.7 smd: 1(-2.25,0) 2(2.25,0)
  silkscreen extent -3.3,-3.05 3.3,3.05, body extent -3,-3 3,3, height 2.9
"OSC 3225-4P" [mm] "3.2*2.5*0.7mm(长宽高)"
  rect 1.3x1.2 smd: 1(-1.05,-0.85) 2(1.05,-0.85) 3(1.05,0.85) 4(-1.05,0.85)
  silkscreen extent -2.03,-1.75 1.91,1.65, body extent -1.6,-1.25 1.6,1.25, height 0.7
"QFN48 7X7_M" [mm] "48脚，长x宽x高：7x7x1mm，脚距：0.5mm"
  rect 0.3x1 smd: 1(-2.75,-3.5)
  oval 0.3x1 smd: 2(-2.25,-3.5) 3(-1.75,-3.5) 4(-1.25,-3.5) 5(-0.75,-3.5) 6(-0.25,-3.5) 7(0.25,-3.5) 8(0.75,-3.5) 9(1.25,-3.5) 10(1.75,-3.5) 11(2.25,-3.5) 12(2.75,-3.5) 25(2.75,3.5) 26(2.25,3.5) 27(1.75,3.5) 28(1.25,3.5) 29(0.75,3.5) 30(0.25,3.5) 31(-0.25,3.5) 32(-0.75,3.5) 33(-1.25,3.5) 34(-1.75,3.5) 35(-2.25,3.5) 36(-2.75,3.5)
  oval 1x0.3 smd: 13(3.5,-2.75) 14(3.5,-2.25) 15(3.5,-1.75) 16(3.5,-1.25) 17(3.5,-0.75) 18(3.5,-0.25) 19(3.5,0.25) 20(3.5,0.75) 21(3.5,1.25) 22(3.5,1.75) 23(3.5,2.25) 24(3.5,2.75) 37(-3.5,2.75) 38(-3.5,2.25) 39(-3.5,1.75) 40(-3.5,1.25) 41(-3.5,0.75) 42(-3.5,0.25) 43(-3.5,-0.25) 44(-3.5,-0.75) 45(-3.5,-1.25) 46(-3.5,-1.75) 47(-3.5,-2.25) 48(-3.5,-2.75)
  rect 3x3 smd mask+0.051: 49(0,0)
  silkscreen extent -3.6,-4.25 3.6,3.6, body extent -3.51,-3.51 3.51,3.51, height 0.95
r0603_l [mm] "1/10W贴片电阻"
  rect 0.75x0.85 smd: 1(-0.725,0) 2(0.725,0)
  silkscreen extent -1.35,-0.69 1.35,0.69, body extent -0.8,-0.4 0.8,0.4, height 0.4
R0603_l [mm] "1/10W贴片电阻"
  rect 0.75x0.85 smd: 1(-0.725,0) 2(0.725,0)
  silkscreen extent -1.35,-0.69 1.35,0.69, body extent -0.8,-0.4 0.8,0.4, height 0.4
SOD-123 [mil] "2.7x1.6X1.1mm（长宽高，不包括引脚）"
  rect 55x50 smd: 1(-67.5,0)
  oct 55x50 smd: 2(67.5,0)
  silkscreen extent -108,-35 112,35, body extent -73,-31 73,31, height 48
SOD-323 [mm] "1.8x1.3X0.9mm（长宽高，不包括引脚）"
  rect 1x0.8 smd: 1(-1.4,0)
  oct 1x0.8 smd: 2(1.4,0)
  silkscreen extent -2.11,-0.76 2.11,0.76, body extent -1.34,-0.63 1.31,0.67, height 1
SOP-8 [mil] "封装库来自淘宝卖家 ID：黄晶宝石"
  oval 80x24 smd: 1(-110,75) 2(-110,25) 3(-110,-25) 4(-110,-75) 5(110,-75) 6(110,-25) 7(110,25) 8(110,75)
  silkscreen extent -50,-100 50,100, body extent -118,-98 118,98, height 75
"TLV9064 RUC" [mm] "TLV9064 RUC"
  rrect50% 0.81x0.22 smd: 1(-0.945,0.8) 2(-0.945,0.4) 3(-0.945,0) 4(-0.945,-0.4) 5(-0.945,-0.8) 8(0.945,-0.8) 9(0.945,-0.4) 10(0.945,0) 11(0.945,0.4) 12(0.945,0.8)
  rrect50% 0.22x0.81 smd: 6(-0.2,-0.945) 7(0.2,-0.945) 13(0.2,0.945) 14(-0.2,0.945)
  silkscreen extent -2,-1.22 1.03,1.22, body extent -1,-1 1,1, height 0.4
VSON-10_L3.0-W3.0-P0.50-TL-EP [mm]
  rect 0.8x0.3 smd: 1(-1.5,1) 2(-1.5,0.5) 3(-1.5,0) 4(-1.5,-0.5) 5(-1.5,-1) 6(1.5,-1) 7(1.5,-0.5) 8(1.5,0) 9(1.5,0.5) 10(1.5,1)
  rect 1.52x2.4 smd: 11(0.002,-0.009)
  Top Layer 1 region: -0.758,1.191 -0.398,1.191 -0.398,1.706 -0.098,1.706 -0.098,1.191 0.102,1.191 0.102,1.706 0.402,1.706 0.402,1.191 0.761,1.191 0.761,-1.209 0.402,-1.209 0.402,-1.714 0.102,-1.714 0.102,-1.209 -0.098,-1.209 -0.098,-1.714 -0.398,-1.714 -0.398,-1.209 -0.759,-1.209 -0.759,0.886 -0.758,0.886 -0.758,1.191
  silkscreen extent -1.98,-1.5 1.5,1.6, body extent -1.51,-1.52 1.51,1.5, height 0.61
X2SON-4_L0.8-W0.8-P0.48-TL-DPW [mm]
  round 0.044 smd: 1(-0.39,0.24) 2(-0.39,-0.24) 4(0.39,-0.24) 5(0.39,0.24)
  rect 0.25x0.25 smd rot 45 mask-2539.97: 3(0,0)
  Top Layer 1 region: 0.34,0.13 0.18,0.29 0.18,0.35 0.6,0.35 0.6,0.13 0.34,0.13
  Top Layer 1 region: 0.34,-0.13 0.18,-0.29 0.18,-0.35 0.6,-0.35 0.6,-0.13 0.34,-0.13
  Top Layer 1 region: -0.34,0.13 -0.18,0.29 -0.18,0.35 -0.6,0.35 -0.6,0.13 -0.34,0.13
  Top Layer 1 region: -0.34,-0.13 -0.18,-0.29 -0.18,-0.35 -0.6,-0.35 -0.6,-0.13 -0.34,-0.13
  silkscreen extent -0.81,-0.58 0.51,0.58, body extent -0.4,-0.4 0.4,0.4, height 0.4
XT150_母座夹板 [mm] "XT150_母座夹板"
  round 1 hole 0.762: 1(-21.184,4.267) 1(-21.184,6.172) 1(-21.184,-6.133) 1(-21.184,-4.228) 1(-19.463,4.267) 1(-19.463,6.172) 1(-19.463,-6.133) 1(-19.463,-4.228) 1(-17.742,4.267) 1(-17.742,6.172) 1(-17.742,-6.133) 1(-17.742,-4.228) 1(-16.021,4.267) 1(-16.021,6.172) 1(-16.021,-6.133) 1(-16.021,-4.228) 1(-14.3,4.267) 1(-14.3,6.172) 1(-14.3,-6.133) 1(-14.3,-4.228) 1(-12.579,4.267) 1(-12.579,6.172) 1(-12.579,-6.133) 1(-12.579,-4.228) 1(-10.859,4.267) 1(-10.859,6.172) 1(-10.858,-6.133) 1(-10.858,-4.228) 1(-9.138,4.267) 1(-9.138,6.172) 1(-9.138,-6.133) 1(-9.138,-4.228) 1(-7.417,4.267) 1(-7.417,6.172) 1(-7.417,-6.133) 1(-7.417,-4.228)
  rrect50% 15x3 smd: 1(-14.3,5.2) 1(-14.3,-5.2)
  rrect50% 15x3 smd far side: 1(-14.3,5.2) 1(-14.3,-5.2)
  rrect50% 5x7 smd: 1(0,0)
  body extent -21.78,-3.78 1.22,3.72, height 3.75
"XT150_母座夹板 - duplicate" [mm] "XT150_母座夹板"
  round 1 hole 0.5: 1(-21.184,4.267) 1(-21.184,6.172) 1(-21.184,-6.133) 1(-21.184,-4.228) 1(-19.463,4.267) 1(-19.463,6.172) 1(-19.463,-6.133) 1(-19.463,-4.228) 1(-17.742,4.267) 1(-17.742,6.172) 1(-17.742,-6.133) 1(-17.742,-4.228) 1(-16.021,4.267) 1(-16.021,6.172) 1(-16.021,-6.133) 1(-16.021,-4.228) 1(-14.3,4.267) 1(-14.3,6.172) 1(-14.3,-6.133) 1(-14.3,-4.228) 1(-12.579,4.267) 1(-12.579,6.172) 1(-12.579,-6.133) 1(-12.579,-4.228) 1(-10.859,4.267) 1(-10.859,6.172) 1(-9.138,4.267) 1(-9.138,6.172) 1(-7.417,4.267) 1(-7.417,6.172)
  rrect50% 10x3 smd: 1(-16.688,-5.2)
  rrect50% 10x3 smd far side: 1(-16.688,-5.2)
  rrect50% 15x3 smd: 1(-14.3,5.2)
  rrect50% 15x3 smd far side: 1(-14.3,5.2)
  rrect50% 5x7 smd: 1(0,0)
  body extent -21.78,-3.78 1.22,3.72, height 3.75
"XT150_母座夹板 - PGND" [mm] "XT150_母座夹板"
  round 1 hole 0.5: 1(-21.184,-6.133) 1(-21.184,-4.228) 1(-19.463,-6.133) 1(-19.463,-4.228) 1(-17.742,-6.133) 1(-17.742,-4.228) 1(-16.021,-6.133) 1(-16.021,-4.228) 1(-14.3,-6.133) 1(-14.3,-4.228) 1(-12.579,-6.133) 1(-12.579,-4.228) 1(-10.858,-6.133) 1(-10.858,-4.228) 1(-9.138,-6.133) 1(-9.138,-4.228) 1(-7.417,-6.133) 1(-7.417,-4.228)
  rrect50% 15x3 smd far side: 1(-14.3,5.2) 1(-14.3,-5.2)
  rrect50% 15x3 smd: 1(-14.3,-5.2)
  rrect50% 5x7 smd: 1(0,0)
  body extent -21.78,-3.78 1.22,3.72, height 3.75
"XT150_母座夹板 - VBUS" [mm] "XT150_母座夹板"
  round 1 hole 0.5: 1(-21.184,4.267) 1(-21.184,6.172) 1(-19.463,4.267) 1(-19.463,6.172) 1(-17.742,4.267) 1(-17.742,6.172) 1(-16.021,4.267) 1(-16.021,6.172) 1(-14.3,4.267) 1(-14.3,6.172) 1(-12.579,4.267) 1(-12.579,6.172) 1(-10.858,4.267) 1(-10.858,6.172) 1(-9.138,4.267) 1(-9.138,6.172) 1(-7.417,4.267) 1(-7.417,6.172)
  rrect50% 15x3 smd: 1(-14.3,5.2)
  rrect50% 15x3 smd far side: 1(-14.3,5.2) 1(-14.3,-5.2)
  rrect50% 5x7 smd: 1(0,0)
  body extent -21.78,-3.78 1.22,3.72, height 3.75
ZQFN-4L_L1.0-W1.0-P0.63-BL-EP [mm]
  round 0.06 smd mask+0.102: 1(-0.313,-0.325) 2(0.313,-0.325) 3(0.313,0.325) 4(-0.313,0.325)
  rect 0.5x0.5 smd rot 45 mask-2539.97: 5(0,0)
  Top Layer 1 region: -0.163,-0.525 -0.463,-0.525 -0.463,-0.125 -0.163,-0.425 -0.163,-0.525
  Top Layer 1 region: 0.163,0.525 0.463,0.525 0.463,0.175 0.413,0.175 0.163,0.425 0.163,0.525
  Top Layer 1 region: -0.463,0.175 -0.463,0.525 -0.163,0.525 -0.163,0.475 -0.163,0.425 -0.413,0.175 -0.463,0.175
  Top Layer 1 region: 0.463,-0.175 0.463,-0.525 0.163,-0.525 0.163,-0.425 0.413,-0.175 0.463,-0.175
  silkscreen extent -0.83,-0.7 0.66,0.7, body extent -0.5,-0.5 0.5,0.5, height 0.4
"贴片排母2.54mm_交错_7P - 正脚位" [mm] "贴片排母2.54mm_交错_8P"
  rect 1.27x2.2 smd: 1(-2.54,-3.6) 2(0,0) 3(2.54,-3.6) 4(5.08,0) 5(7.62,-3.6) 6(10.16,0) 7(12.7,-3.6)
  silkscreen extent -3.96,-4.49 13.97,-0.53, body extent -4.04,-4.25 16.79,0.65, height 5.3
"贴片排母2.54mm_交错_8P - 正脚位" [mm] "贴片排母2.54mm_交错_8P"
  rect 1.27x2.2 smd: 1(-2.54,-3.6) 2(0,0) 3(2.54,-3.6) 4(5.08,0) 5(7.62,-3.6) 6(10.16,0) 7(12.7,-3.6) 8(15.24,0)
  silkscreen extent -3.96,-4.49 16.51,-0.53, body extent -4.04,-4.25 16.79,0.65, height 5.3

## Part data
C1 C2 C3 C4 C5 C6 C7 C8 C9 C14 C19 C22 C34 C35 C36 C37 C38 C39 C40 C41 C42 C43 C44 C45 C46 C47 C48 C49: library part C-MLCC, "独石电容"
C10 C11 C12 C15 C16 C17 C18 C20 C21 C23 C24 C25 C26 C27 C28 C29 C30 C31 C32 C33 C?: library part C, "无极性贴片电容"
D1 D2 D7: "快恢复整流二极管"
D3 D4 D5 D6 D8 D9: "高速开关二极管"
D?: library part 1N4148, "高速开关二极管"
E1: library part C-CD, "贴片钽电容"
JP1 JP2 JP3 JP6: library part "Header 8", "8P接插件"
JP4: library part "Header 4", "4P接插件"
JP5: library part "Header 6", "6P接插件"
L1 L2: library part L, "小功率贴片电感"
LB1: library part LB, "磁珠"
OPA1: "4路运放 14 引脚 X2QFN"
OPA2: "TLV9061 DPW单路运放"
R1 R2 R3 R4 R5 R6 R7 R8 R9 R10 R11 R12 R13 R14 R15 R16 R17 R18 R19 R20 R21 R22 R23 R24 R25 R26 R27 R28 R29 R30 R31 R32 R33 R34 R35 R36 R37 R38 R39 R40 R41 R42 R43 R44 R45 R46 R47 R48 R49 R50 R51 R52 R53 R54 R55 R56 R57 R58 R59 R60 R61 R62 R63 R64 R65: library part R, "贴片电阻"
U1 U3: "与SOT-23-5符号不同！！！！！"
U2: "BUCK"
U5: "DCDC降压芯片 最大电压100V 最大电流1A"
U6 U7 U8: "栅极驱动"
U9: "RS485/RS422收发器"
Y1: library part Crystal

## Via types
v1: diameter 15.75, hole 11.81, Top Layer 1 to Bottom Layer 1, tented both sides, 362 vias
v2: diameter 39.37, hole 28, Top Layer 1 to Bottom Layer 1, tented both sides, 120 vias

## Nets (pads, with @x,y where several pads share a name; then routed paths per layer and width w, separated by ;. In a path a pad name is that pad's centre, name@x,y a point inside that pad or via, vN(x,y) a via of type N, cw(c..) or ccw(c..) an arc to the next point about the centre after c; other vN are vias at no path point)
ADC2_IN3: C36.2 R51.1 U4.14 | length 856.4
  Top Layer 1 w8: v1(1525,425) 1525.21,425.21 1554.59,425.21 U4.14@1554.8,425.42 ; v1(2191,309.91) 2191,286.46 R51.1@2190,285.46 2245.91,285.46 C36.2@2248.46,288
  Bottom Layer 1 w8: v1@1527,426 1528,425 2127,425 2191,361 v1(2191,309.91)
ADC2_IN4: C37.2 R56.1 U4.15 | length 913.2
  Top Layer 1 w8: U4.15@1554.8,445.1 1555.24,445.55 1587.55,445.55 v1(1588,446) ; v1(2190,686.09) R56.1@2190,710.54 2245.91,710.54 C37.2@2248.46,708
  Bottom Layer 1 w8: v1@1594,446 2121,446 2190,515 v1(2190,686.09)
ADC2_IN5: C34.2 R41.1 U4.16 | length 858.3
  Top Layer 1 w8: v1(1525,465) 1525.11,464.89 1554.69,464.89 U4.16@1554.8,464.79 ; C34.2@2017.54,708 2019.09,709.54 R41.1@2076,709.54 2075,708.54 v1(2075,685.09)
  Bottom Layer 1 w8: v1@1526,465 2033,465 2075,507 v1(2075,685.09)
ADC2_IN13: C35.2 R46.1 U4.13 U4.18 | length 851.7
  Top Layer 1 w8: U4.13@1546.27,405.73 1519.45,405.73 1502,423.18 1502,491 1515.16,504.16 U4.18@1554.8,504.16 ; U4.13@1554.8,405.73 1554.93,405.87 1587.87,405.87 v1(1588,406) ; C35.2@2017.54,288 2073.46,288 R46.1@2075,286.46 ; v1(2075,309.91) R46.1@2075,286.46 ; R46.1@2076,285.46 R46.1@2075,286.46
  Bottom Layer 1 w8: v1(1588,406) 2032,406 2075,363 v1(2075,309.91)
ADC_VBUS: C?.2 D?.2 R4.2 R6.1 U4.17 | length 3776.8
  Top Layer 1 w8: U4.17@1554.8,484.47 1555.06,484.74 1583.74,484.74 v1(1584,485)
  Top Layer 1 w15: D?.2@3484,1985.12 3558.57,1985.12 3562.46,1989 ; C?.2@3562.46,1870 v1(3562.46,1899) R6.1@3562.46,1949 3562.46,1989 ; R4.2@3562.46,2029 3562.46,1989
  Bottom Layer 1 w8: v1(1584,485) 1584,530.88 1613.12,560 1776,560 1875,659 1875,782 1897,804 3643,804 3696,857 3696,1844 3641,1899 v1(3562.46,1899)
AGND: C14.2 C34.1 C35.1 C36.1 C37.1 C38.1 C47.1 C48.1 C49.2 OPA1.10 OPA2.3 R60.2 | length 836.4
  Top Layer 1 w6: OPA2.3@2654.01,638 v1(2654,669)
  Top Layer 1 w8: v1(2131,498) v1(2278,498)
  Top Layer 1 w10: v1(2507.01,569.87) 2531.33,569.87 C38.1@2531.46,570 ; v1(2507.01,704.87) 2531.33,704.87 R60.2@2531.46,705
  Top Layer 1 w15: C48.1@1725.09,542 C48.1@1725.2,541.89 ; C14.2@1725.32,375 1725.32,511 1725.2,511.11 C48.1@1725.2,541.89 ; C47.1@1725.54,481 1725.66,481.11 v1(1750.11,481.11) ; v1(1749.77,542) 1725.31,542 C48.1@1725.2,541.89 ; v1(1750,313) 1749.86,313.14 1727.4,313.14 C49.2@1725.54,315 1725.49,315.06 1725.49,345.06 v1(1725.43,345.11) 1725.43,374.89 C14.2@1725.54,375 v1(1750,375) ; C35.1@1960.46,288 1961.27,288.81 v1(1984.76,288.81) ; C34.1@1960.46,708 1961.31,707.14 1984.76,707.14 v1(1984.91,707) ; v1(2281.09,288) C36.1@2305.54,288 ; v1(2281.09,708) C37.1@2305.54,708 ; C38.1@2531.46,570 2533.31,568.14 2555.76,568.14 v1(2555.91,568) ; R60.2@2531.46,705 v1(2555.91,705)
  Top Layer w15: 2574,602 2633.75,602 2654,622.25 v1(2654,669)
BOOT0: R63.2 U4.46 | length 236.5
  Top Layer 1 w8: R63.2@1167.54,595 1167.54,593.03 1178.31,582.27 1198.22,582.27 1214,566.49 1214,461.42 1230.32,445.1 U4.46@1279.2,445.1
COMP1_OUT: R65.1 U4.8 | length 391.7
  Top Layer 1 w8: R65.1@1110.46,414 v1(1134.91,414) ; v1(1424,431) 1425.48,429.52 1437.48,429.52 1446.53,420.47 U4.8@1446.53,376.2
  Top Layer w8: v1(1134.91,414) 1151.91,431 v1(1424,431)
GND: C2.1 C3.1 C4.1 C5.1 C6.1 C8.2 C9.1 C11.1 C12.1 C14.1 C15.1 C16.1 C17.1 C18.1 C19.2 C20.1 C21.1 C22.1 C23.2 C24.2 C29.1 C30.1 C33.1 C39.2 C40.1 C41.1 C42.1 C43.1 C44.1 C45.1 C46.1 C49.1 C?.1 D?.1 E1.2 JP4.0@786.36,92.72 JP4.2 JP5.0 JP5.2 JP6.0 JP6.2 LB1.2 R2.2 R5.2 R6.2 R11.2 R12.2 R13.2 R17.2 R18.2 R27.1 R28.1 R32.2 R37.1 R63.1 U1.2 U1.5 U2.3 U2.4 U2.5 U2.11 U3.2 U3.5 U4.49 U5.1 U5.9 U6.4 U7.4 U8.4 U9.5 U9.9 Y1.2 Y1.4 | length 3847.6
  Top Layer 1 w8: v1(578.85,160.06) JP4.2@578.85,203.37 JP4.2@578.85,203.37 ; v1(1028.21,160.06) JP5.2@1028.21,203.37 JP5.2@1028.28,203.43 ; v1(1574,161) 1574,203.16 JP6.2@1574.21,203.37 ; U9.5@2288.61,88.62 2288.8,88.81 2310.72,88.81 v1(2310.91,89) ; R13.2@2596,235.09 U2.11@2698.28,235.09 ; U2.5@2677.62,288.93 2677.62,255.74 U2.11@2698.28,235.09 ; U2.4@2697.32,288.93 2697.32,249.15 U2.11@2711.38,235.09 ; U2.3@2716.99,288.93 U2.11@2716.99,230.17 ; R12.2@2835,234.09 2720.91,234.09 U2.11@2716.99,230.17 ; U2.11@2698.28,235.09 U2.11@2711.38,235.09 ; U2.11@2711.38,235.09 U2.11@2716.64,229.82 U2.11@2716.99,230.17
  Top Layer 1 w10: v1(443.91,905) 420.46,905 R17.2@419.46,906 418.96,906.5 418.96,935.5 v1(418.46,936) 418.96,936.5 418.96,965.5 419.46,966 v1(443.91,966) ; v1(590,1107.92) C29.1@590,1082.54 590.27,1082.27 616.73,1082.27 v1(617,1082) ; v1(620,312.64) 620,336.09 C40.1@621,337.09 ; v1(682,313.64) C39.2@682,337.09 C39.2@683,338.09 ; v1(801,869) U6.4@801,919 ; v1(843.55,298.33) 867.87,298.33 C24.2@868,298.46 ; v1(933.66,261.21) 933.66,285.54 Y1.4@933.54,285.66 933.66,285.79 v1(957.98,285.79) ; v1(976.02,368.21) 1000.34,368.21 Y1.2@1000.46,368.34 1000.34,368.46 v1(1000.34,392.79) ; C23.2@1072,355.54 1072.13,355.67 v1(1096.45,355.67) ; v1(1109,682) 1109.73,681.27 1109.73,655.73 1110.73,654.73 1110.23,654.23 1110.23,625.23 v1(1110,625) 1110.23,624.77 1110.23,595.23 R63.1@1110.46,595 1110.23,594.77 1110.23,564.23 v1(1110,564) 1110.46,563.54 1110.46,534.46 C43.1@1110.91,534 1110.57,533.66 1110.57,504.11 v1(1110.23,503.77) 1110.23,474.23 C44.1@1110.46,474 1110.73,473.73 v1(1110.73,448.88) ; v1(1643,314) 1667.46,314 C49.1@1668.46,315 ; v1(1643,374) 1667.46,374 C14.1@1668.23,374.77 ; v1(1692.91,314) 1669.46,314 C49.1@1668.46,315 ; v1(1692.91,374) 1669.46,374 C14.1@1668.46,375 C14.1@1668.23,374.77 ; v1(1725,576.61) v1(1725,576.61) 1725.04,602.96 C46.1@1725.09,603 ; v1(1729.36,906) 1705.91,906 R18.2@1704.91,907 1704.41,907.5 1704.41,936.5 v1(1703.91,937) 1704.41,937.5 1704.41,966.5 1704.91,967 v1(1729.36,967) ; v1(1870,1111.13) 1870,1085.54 C30.1@1871,1084.54 1871.23,1084.77 1897.77,1084.77 v1(1898,1085) ; v1(2062.87,914) 2078,914 U7.4@2083,919 ; C21.1@2535.13,98.75 2535.25,98.63 v1(2535.25,74.3) ; v1(2645.55,569.35) 2669.87,569.35 C22.1@2670,569.47 2670.53,570 v1(2694.45,570) ; v1(2645.88,705.47) 2670.2,705.47 C19.2@2670.33,705.6 ; v1(2655,66.11) 2655,41.79 C20.1@2655.13,41.67 ; v1(2670.33,729.92) C19.2@2670.33,705.6 ; v1(2694.91,705) 2670.93,705 C19.2@2670.46,705.47 C19.2@2670.33,705.6 ; v1(2715,66.11) 2715,41.79 R11.2@2715.13,41.67 ; v1(2759.43,705.47) 2783.75,705.47 C8.2@2783.87,705.6 ; v1(2759.55,569.35) 2783.87,569.35 C9.1@2784,569.47 2784.53,570 v1(2808.45,570) ; v1(2783.87,729.92) C8.2@2783.87,705.6 ; v1(2808.45,705) 2784.47,705 C8.2@2784,705.47 C8.2@2783.87,705.6 ; v1(2918.55,177.33) C5.1@2942.87,177.33 ; v1(2943,152.88) 2943,177.2 C5.1@2942.87,177.33 ; C18.1@2997.54,485 C18.1@2997.67,485.13 ; v1(3006.13,152.46) 3006.13,176.79 3005.96,176.96 v1(2975,177) 2974.77,177.23 2943.23,177.23 C5.1@2943,177.46 C5.1@2942.87,177.33 ; v1(3015.45,904) 2992,904 R32.2@2991,905 2990.5,905.5 2990.5,934.5 v1(2990,935) 2990.5,935.5 2990.5,964.5 R37.1@2991,965 v1(3015.45,965) ; v1(3021.99,485.13) C18.1@2997.67,485.13 ; v1(3021.99,546.13) 2997.67,546.13 2997.27,545.73 2997.27,515.27 v1(2997,515) 2997.27,514.73 2997.27,485.52 C18.1@2997.67,485.13 ; R5.2@3079.91,608 3080.04,608.13 v1(3104.36,608.13) ; v1(3158,1105.13) 3158,1080.17 3158.13,1080.04 v1(3187,1080) v1(3187,1080) ; v1(3347.96,914) 3363.09,914 U8.4@3368.09,919 ; R2.2@3416.46,669 3416.58,669.13 v1(3440.91,669.13) ; D?.1@3484,1874.88 3484,1870.94 3513.11,1841.83 3593.35,1841.83 3619.54,1868.03 C?.1@3619.54,1870 3619.77,1870.23 3619.77,1918.77 v1(3620,1919) 3619.77,1919.23 3619.77,1948.77 R6.2@3619.54,1949 ; C2.1@3562.73,451.73 C2.1@3565,449.46 ; C14.1@1668.23,374.77 1668.23,345.23 1668.34,345.11 1668.34,315.11 C49.1@1668.46,315
  Top Layer 1 w15: U3.2@2710.88,650.72 2710.88,650.39 v1(2723.34,637.92) ; U1.2@2824.68,650.79 2824.68,650.46 v1(2837.14,638)
  Top Layer 1 w20: U5.1@3454.35,454 3455.17,453.17 3561.28,453.17 C2.1@3562.73,451.73 ; C2.1@3565,449.46 3747.57,449.46 E1.2@3749,450.89 3749,374
  Top Layer w15: v1(3620,1919) 3706,1833 3706,1156.91
  other v1: 755.72,42.43 785.72,42.43 817.72,42.43 870.36,42.43 902.36,42.43 1303.51,42.43 1333.51,42.43 1365.51,42.43 1416.36,42.43 1448.36,42.43 1947.94,42.43 1977.94,42.43 2009.94,42.43 3538,46 3566,46 3595,46 3623,46 3064,64.12 3092,64.12 3123,66.12 3151,66.12 3183,66.12 3211,66.12 3524,66 3552,66 3581,66 3609,66 2211.81,91.19 2253.81,91.19 3137,94.12 3137,122.12 2211.81,127.19 2253.81,127.19 755,143 787,143 839.64,143 871.64,143 901.64,143 1302.79,143 1334.79,143 1385.64,143 1417.64,143 1447.64,143 1947.21,143 1979.21,143 2009.21,143 2211.81,163.19 2253.81,163.19 2715,208 2678,209 2696,230 2678,252 2715,252 3116,285 3116,313 3579,319 3607,319 3636,319 2529,332 2557,332 2588,334 2616,334 2648,334 2676,334 3537,340 3565,340 3594,340 3622,340 3116,345 3046,358 3074,358 3551,361 3579,361 3608,361 3636,361 3664,361 3693,361 3721,361 2602,362 3116,373 3537,383 3565,383 3594,383 3622,383 3650,383 3679,383 3707,383 2602,390 3116,404 3116,432 1415,465 1441,465 1466,465 3392,470 3310,471 3350,471 1414,515 1440,515 1465,515 3310,529 3351,529 3392,529 1414,563 1440,563 1465,563 3310,588 3351,588 3392,588
HO-U: D3.1 JP1.7 R21.2 | length 1172.4
  Top Layer 1 w15: JP1.7@283.74,1530 626,1530 678,1478 678,1258 704.69,1231.31 1039.91,1231.31 1063,1208.22 1063,1163 R21.2@1057,1157 1055,1155 995,1155 D3.1@993,1153 D3.1@984.75,1161.25
  other v1: 254.62,1513 310.74,1513 254.62,1547 310.73,1547
HO-V: D4.1 JP2.7 R22.2 | length 1144.9
  Top Layer 1 w15: JP2.7@1571.74,1531 1906,1531 1963,1474 1963,1262 1995,1230 2320.48,1230 2339,1211.48 R22.2@2339,1156 2337,1154 2277,1154 D4.1@2275,1152
  other v1: 1542.62,1514 1598.74,1514 1542.62,1548 1598.73,1548
HO-W: D8.1 JP3.7 R34.2 | length 1126.8
  Top Layer 1 w15: JP3.7@2856.74,1530 3211,1530 3254,1487 3254,1301 3321,1234 3598,1234 3624,1208 R34.2@3624,1156.44 3622,1154.44 3562,1154.44 D8.1@3560,1152.44
  other v1: 2827.62,1513 2883.74,1513 2827.62,1547 2883.73,1547
LO-U: D5.1 JP1.3 R29.2 | length 880.5
  Top Layer 1 w15: v1(310.73,1147) 319.05,1147 319.55,1147.5 319.55,1170.55 344,1195 479.78,1195 500.23,1174.56 500.23,1150.54 548.44,1102.33 548.44,1067.79 559.95,1056.28 664.23,1056.28 676.35,1068.4 676.35,1175.58 693.77,1193 828.94,1193 865,1156.94 D5.1@865,1153 ; D5.1@867,1155 927,1155 R29.2@929,1157
  other v1: 254.62,1113 310.74,1113 254.62,1147
LO-V: D6.1 JP2.3 R30.2 | length 880.4
  Top Layer 1 w15: JP2.3@1587.84,1143.68 1598.73,1143.68 1600.89,1145.84 1604.88,1145.84 1607.55,1148.5 1607.55,1172.55 1627.5,1192.5 1774.83,1192.5 1789.32,1178 1789.32,1143.68 1829,1104 1829,1075.96 1848.68,1056.28 1938.77,1056.28 1958,1075.5 1958,1175.23 1973.27,1190.5 2112.56,1190.5 2148.94,1154.11 2148.94,1154.06 2209.06,1154.06 R30.2@2211,1156
  other v1: 1542.62,1114 1598.74,1114 1542.62,1148 1598.73,1148
LO-W: D9.1 JP3.3 R38.2 | length 890.6
  Top Layer 1 w15: JP3.3@2876,1138 JP3.3@2884.36,1146.36 ; v1(2883.73,1147) 2891.5,1147 2892,1147.5 2892,1168.94 2912.06,1189 3054.94,1189 3075,1168.94 3075,1144 3117.03,1101.97 3117.03,1065.26 3129.29,1053 3233.19,1053 3242.86,1062.67 3242.86,1176.78 3259,1192.93 3395.07,1192.93 D9.1@3433.72,1154.28 ; D9.1@3432,1152.56 D9.1@3433.72,1154.28 ; R38.2@3496,1156.44 3494.06,1154.5 3433.94,1154.5 D9.1@3433.72,1154.28
  other v1: 2827.62,1113 2883.74,1113 2827.62,1147
Motor-U: Hole3.1 J3.1
  other v2: 1023.62,1299.21 1102.36,1299.21 1181.1,1299.21 1259.84,1299.21 1062.99,1338.58 1141.73,1338.58 1220.47,1338.58 1299.21,1338.58 1102.36,1377.95 1181.1,1377.95 1259.84,1377.95 1338.58,1377.95 1062.99,1417.32 1141.73,1417.32 1220.47,1417.32 1299.21,1417.32 1023.62,1456.69 1102.36,1456.69 1181.1,1456.69 1259.84,1456.69 1338.58,1456.69 984.25,1496.06 1062.99,1496.06 1141.73,1496.06 1220.47,1496.06 1299.21,1496.06 1102.36,1535.43 1181.1,1535.43 1259.84,1535.43 1338.58,1535.43 748.03,1574.8 826.77,1574.8 905.51,1574.8 984.25,1574.8 1062.99,1574.8 1141.73,1574.8 1220.47,1574.8 1299.21,1574.8 787.4,1614.17 866.14,1614.17 944.88,1614.17 1023.62,1614.17 1102.36,1614.17 748.03,1653.54 826.77,1653.54 905.51,1653.54 984.25,1653.54 1062.99,1653.54 787.4,1692.91 866.14,1692.91 944.88,1692.91 1023.62,1692.91 1102.36,1692.91 826.77,1732.28 905.51,1732.28 984.25,1732.28 1062.99,1732.28 866.14,1771.65 944.88,1771.65 1023.62,1771.65 1102.36,1771.65
Motor-V: Hole4.1 J4.1
  other v2: 2283.46,1299.21 2362.2,1299.21 2322.83,1338.58 2401.57,1338.58 2283.46,1377.95 2362.2,1377.95 2322.83,1417.32 2401.57,1417.32 2283.46,1456.69 2362.2,1456.69 2322.83,1496.06 2401.57,1496.06 2047.24,1535.43 2125.98,1535.43 2204.72,1535.43 2283.46,1535.43 2362.2,1535.43 2086.61,1574.8 2165.35,1574.8 2244.09,1574.8 2322.83,1574.8 2401.57,1574.8 2047.24,1614.17 2125.98,1614.17 2086.61,1653.54 2047.24,1692.91 2125.98,1692.91 2086.61,1732.28 2047.24,1771.65 2125.98,1771.65
Motor-W: Hole5.1 J5.1 | length 172.9
  Top Layer 1 w8: J5.1@3175.28,1697.01 3179.37,1692.91 v2(3346.46,1692.91)
  other v2: 3582.68,1299.21 3582.68,1377.95 3582.68,1456.69 3543.31,1496.06 3346.46,1535.43 3425.2,1535.43 3503.94,1535.43 3582.68,1535.43 3385.83,1574.8 3464.57,1574.8 3543.31,1574.8 3346.46,1614.17 3425.2,1614.17 3503.94,1614.17 3582.68,1614.17 3385.83,1653.54 3464.57,1653.54 3543.31,1653.54 3425.2,1692.91 3503.94,1692.91 3582.68,1692.91 3385.83,1732.28 3464.57,1732.28 3543.31,1732.28 3346.46,1771.65 3425.2,1771.65 3503.94,1771.65 3582.68,1771.65
NetC1_1: C1.1 L1.1 U5.8 | length 87.2
  Top Layer 1 w15: C1.1@3165,327.46 3251.46,327.46 3252,328
NetC1_2: C1.2 U5.7 | length 174.5
  Top Layer 1 w15: C1.2@3165,384.54 3165,456.93 3210.8,502.73 3246.38,502.73 U5.7@3247.65,504
NetC7_1: C7.1 R1.2 R5.1 U5.5 | length 228.7
  Top Layer 1 w8: C7.1@3137,486 R5.1@3137,608 ; R5.1@3141,604 U5.5@3247.65,604
NetC10_1: C10.1 L2.1 U2.2 | length 345.7
  Top Layer 1 w8: v1(2736.36,317.64) 2736.52,317.48 2736.52,289.09 U2.2@2736.68,288.93 ; v1(2835,66.11) 2835,41.79 C10.1@2835.13,41.67
  Bottom Layer 1 w15: v1(2736.36,317.64) 2736.36,164.75 v1(2835,66.11)
NetC10_2: C10.2 U2.9 | length 146.1
  Top Layer 1 w8: U2.9@2736.68,170.83 2736.68,140.46 2748.64,128.51 2803.4,128.51 2833.16,98.75 C10.2@2835.13,98.75